# Altium PCB PCB.PcbDoc (part 1 of 2)
Units mm, origin at the board's own origin, x right, y up, seen from the top; angles counter-clockwise.
Board outline 82 x 200 mm, 4 copper layers (Top Layer, Signal Layer 1, Signal Layer 2, Bottom Layer), stack 0.778 mm thick; 206 components, 124 nets, 689 pads, 384 vias.
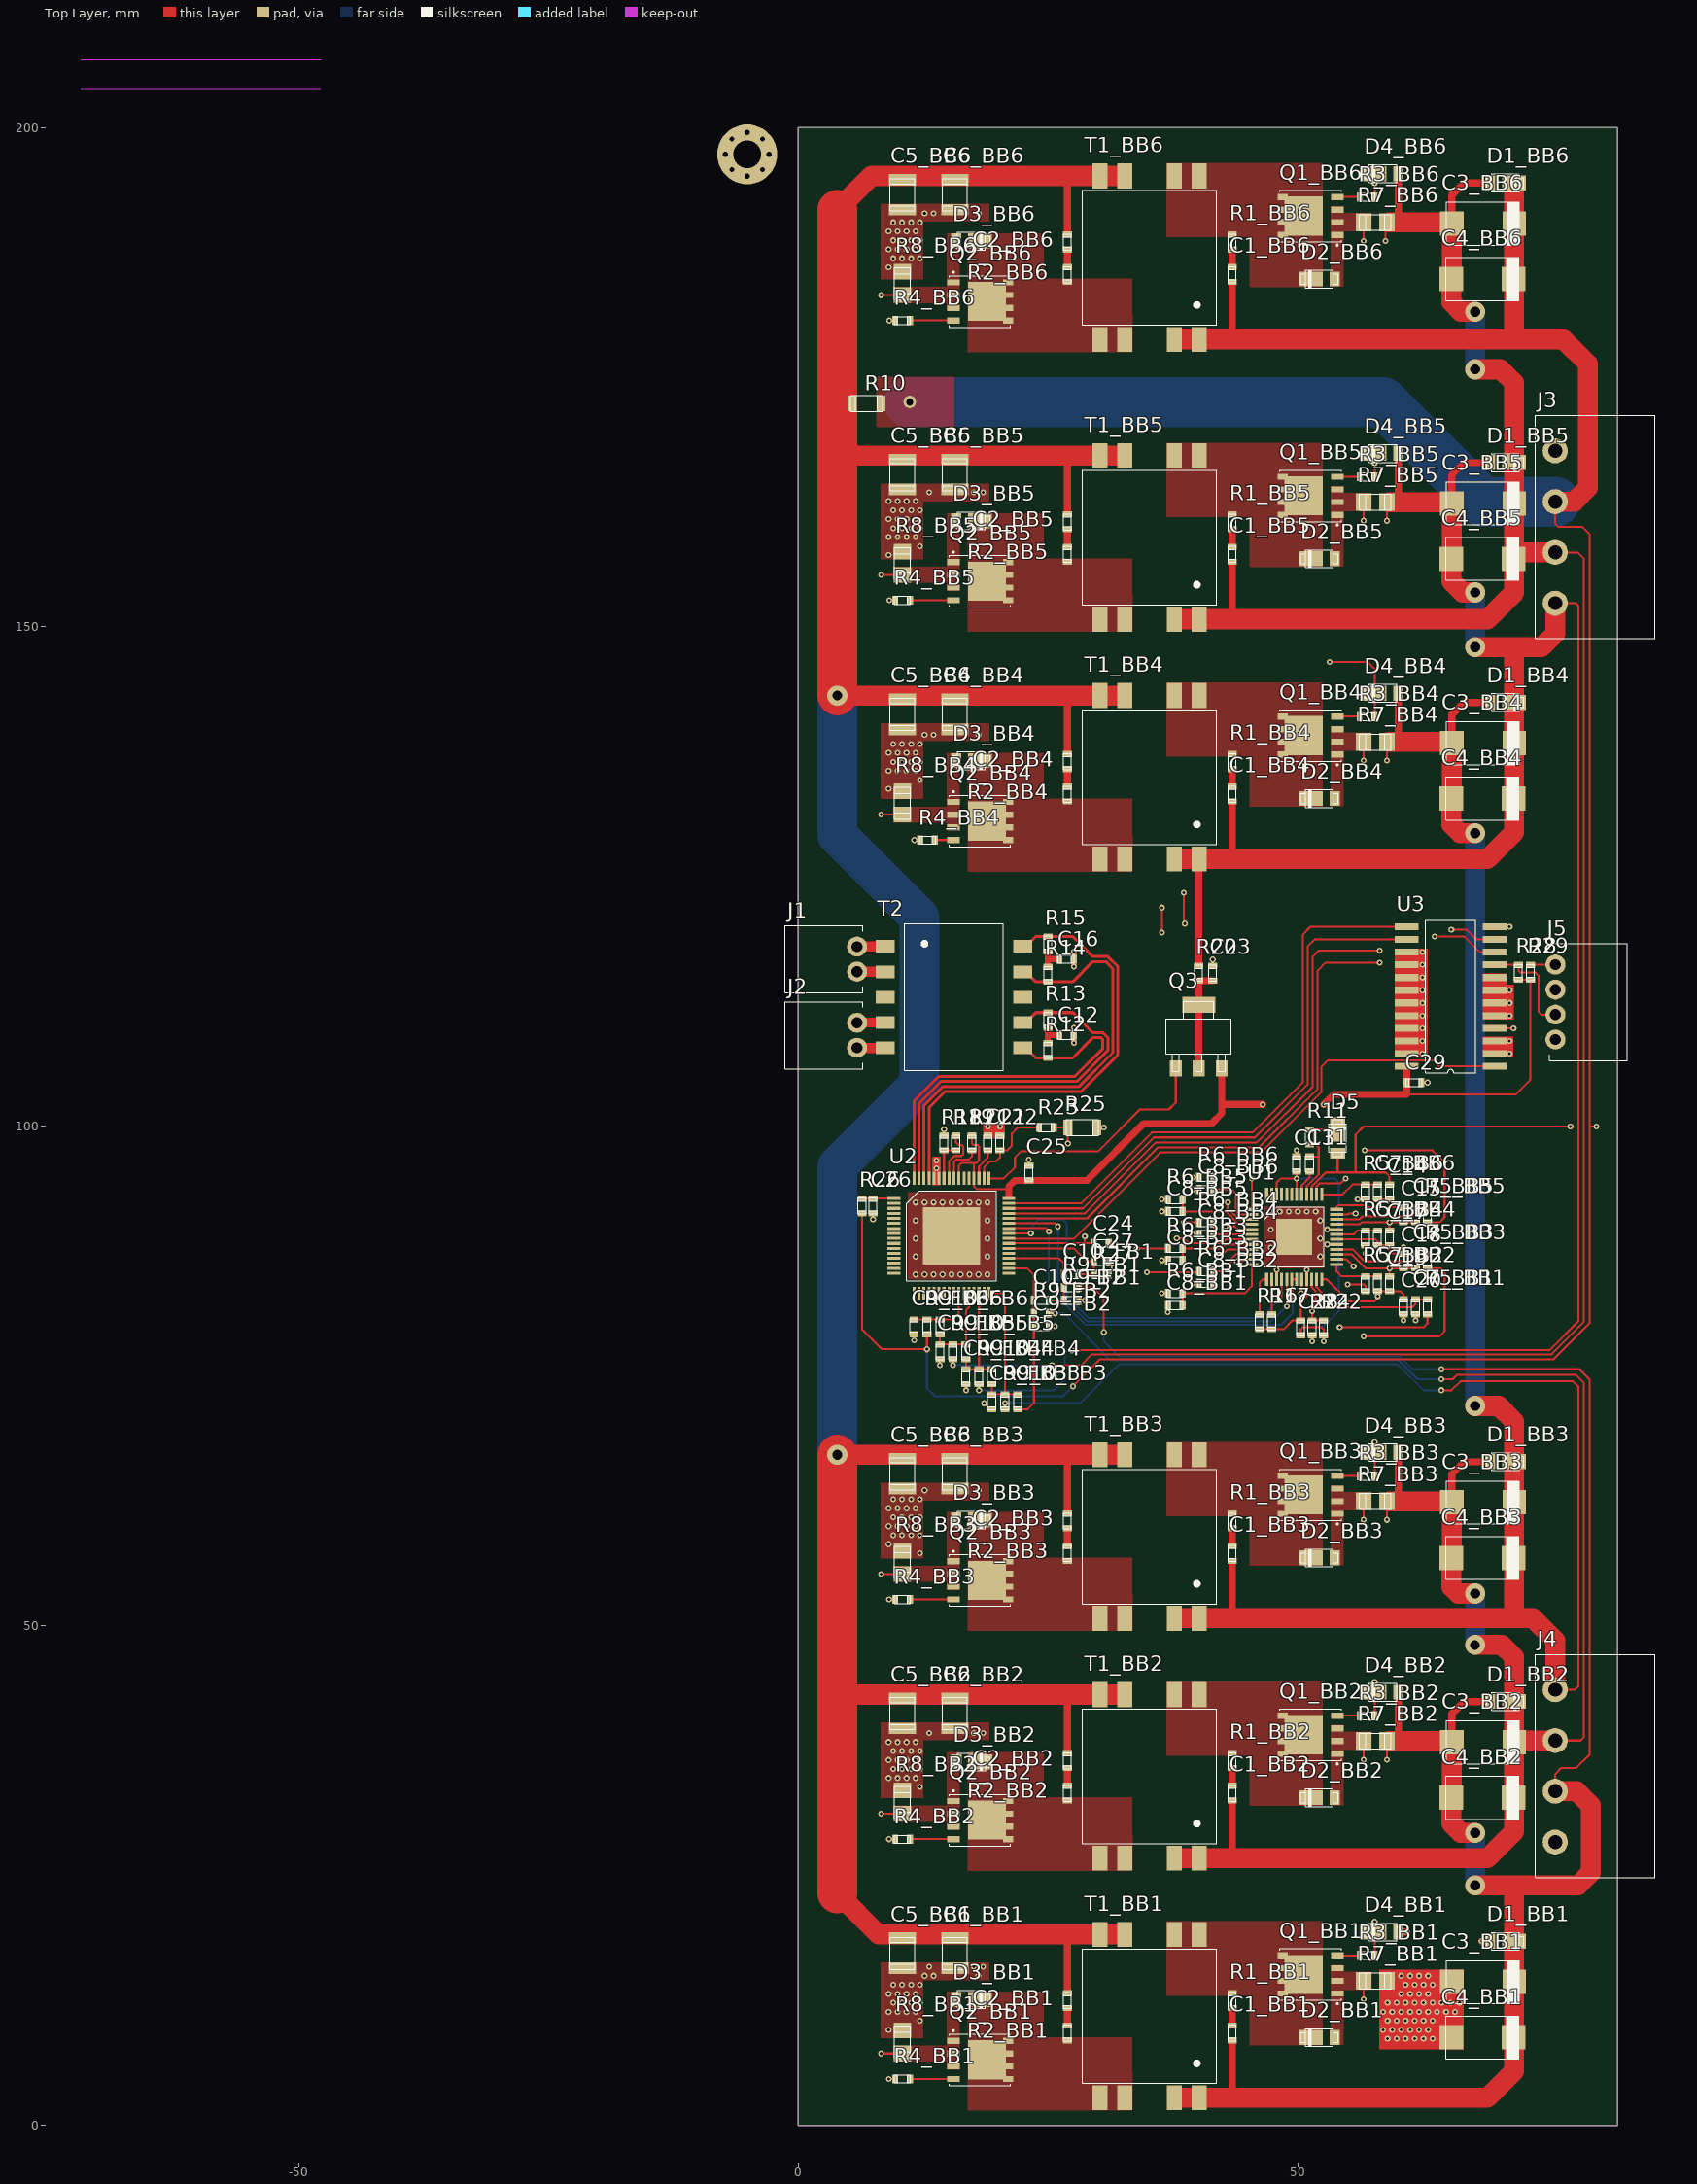
[diagram p0: Top Layer view]
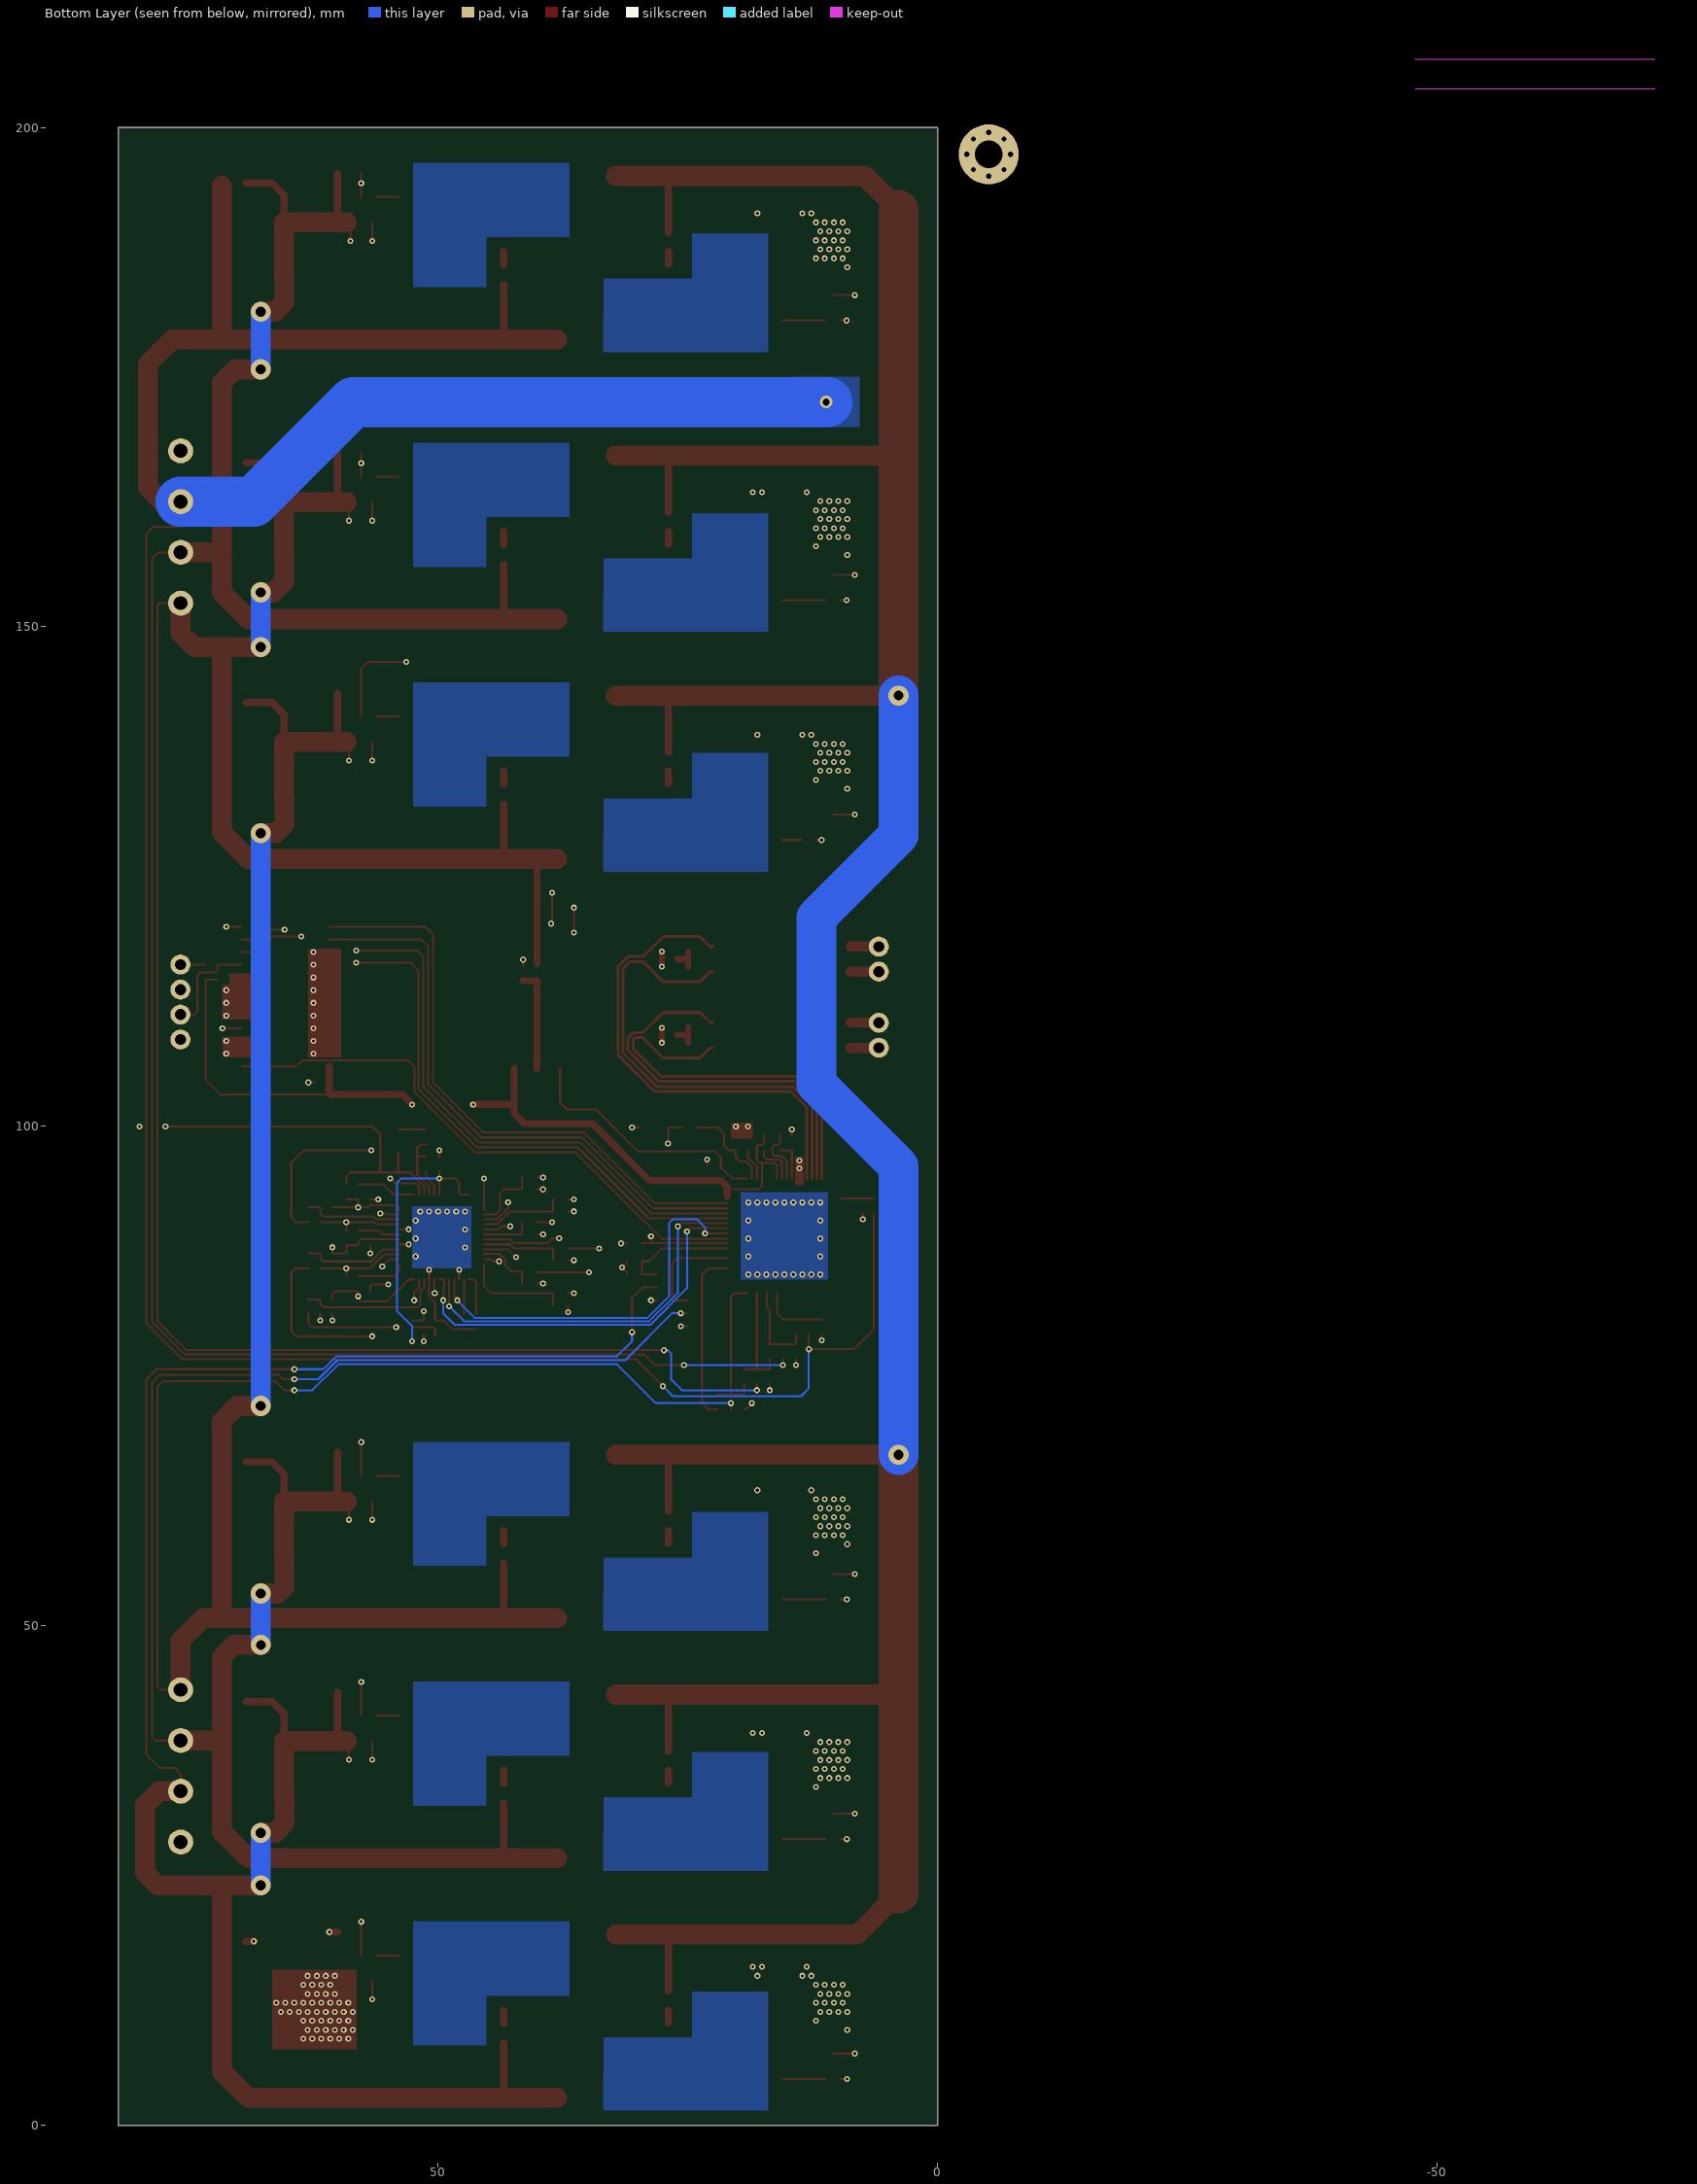
[diagram p1: Bottom Layer view, seen from below]
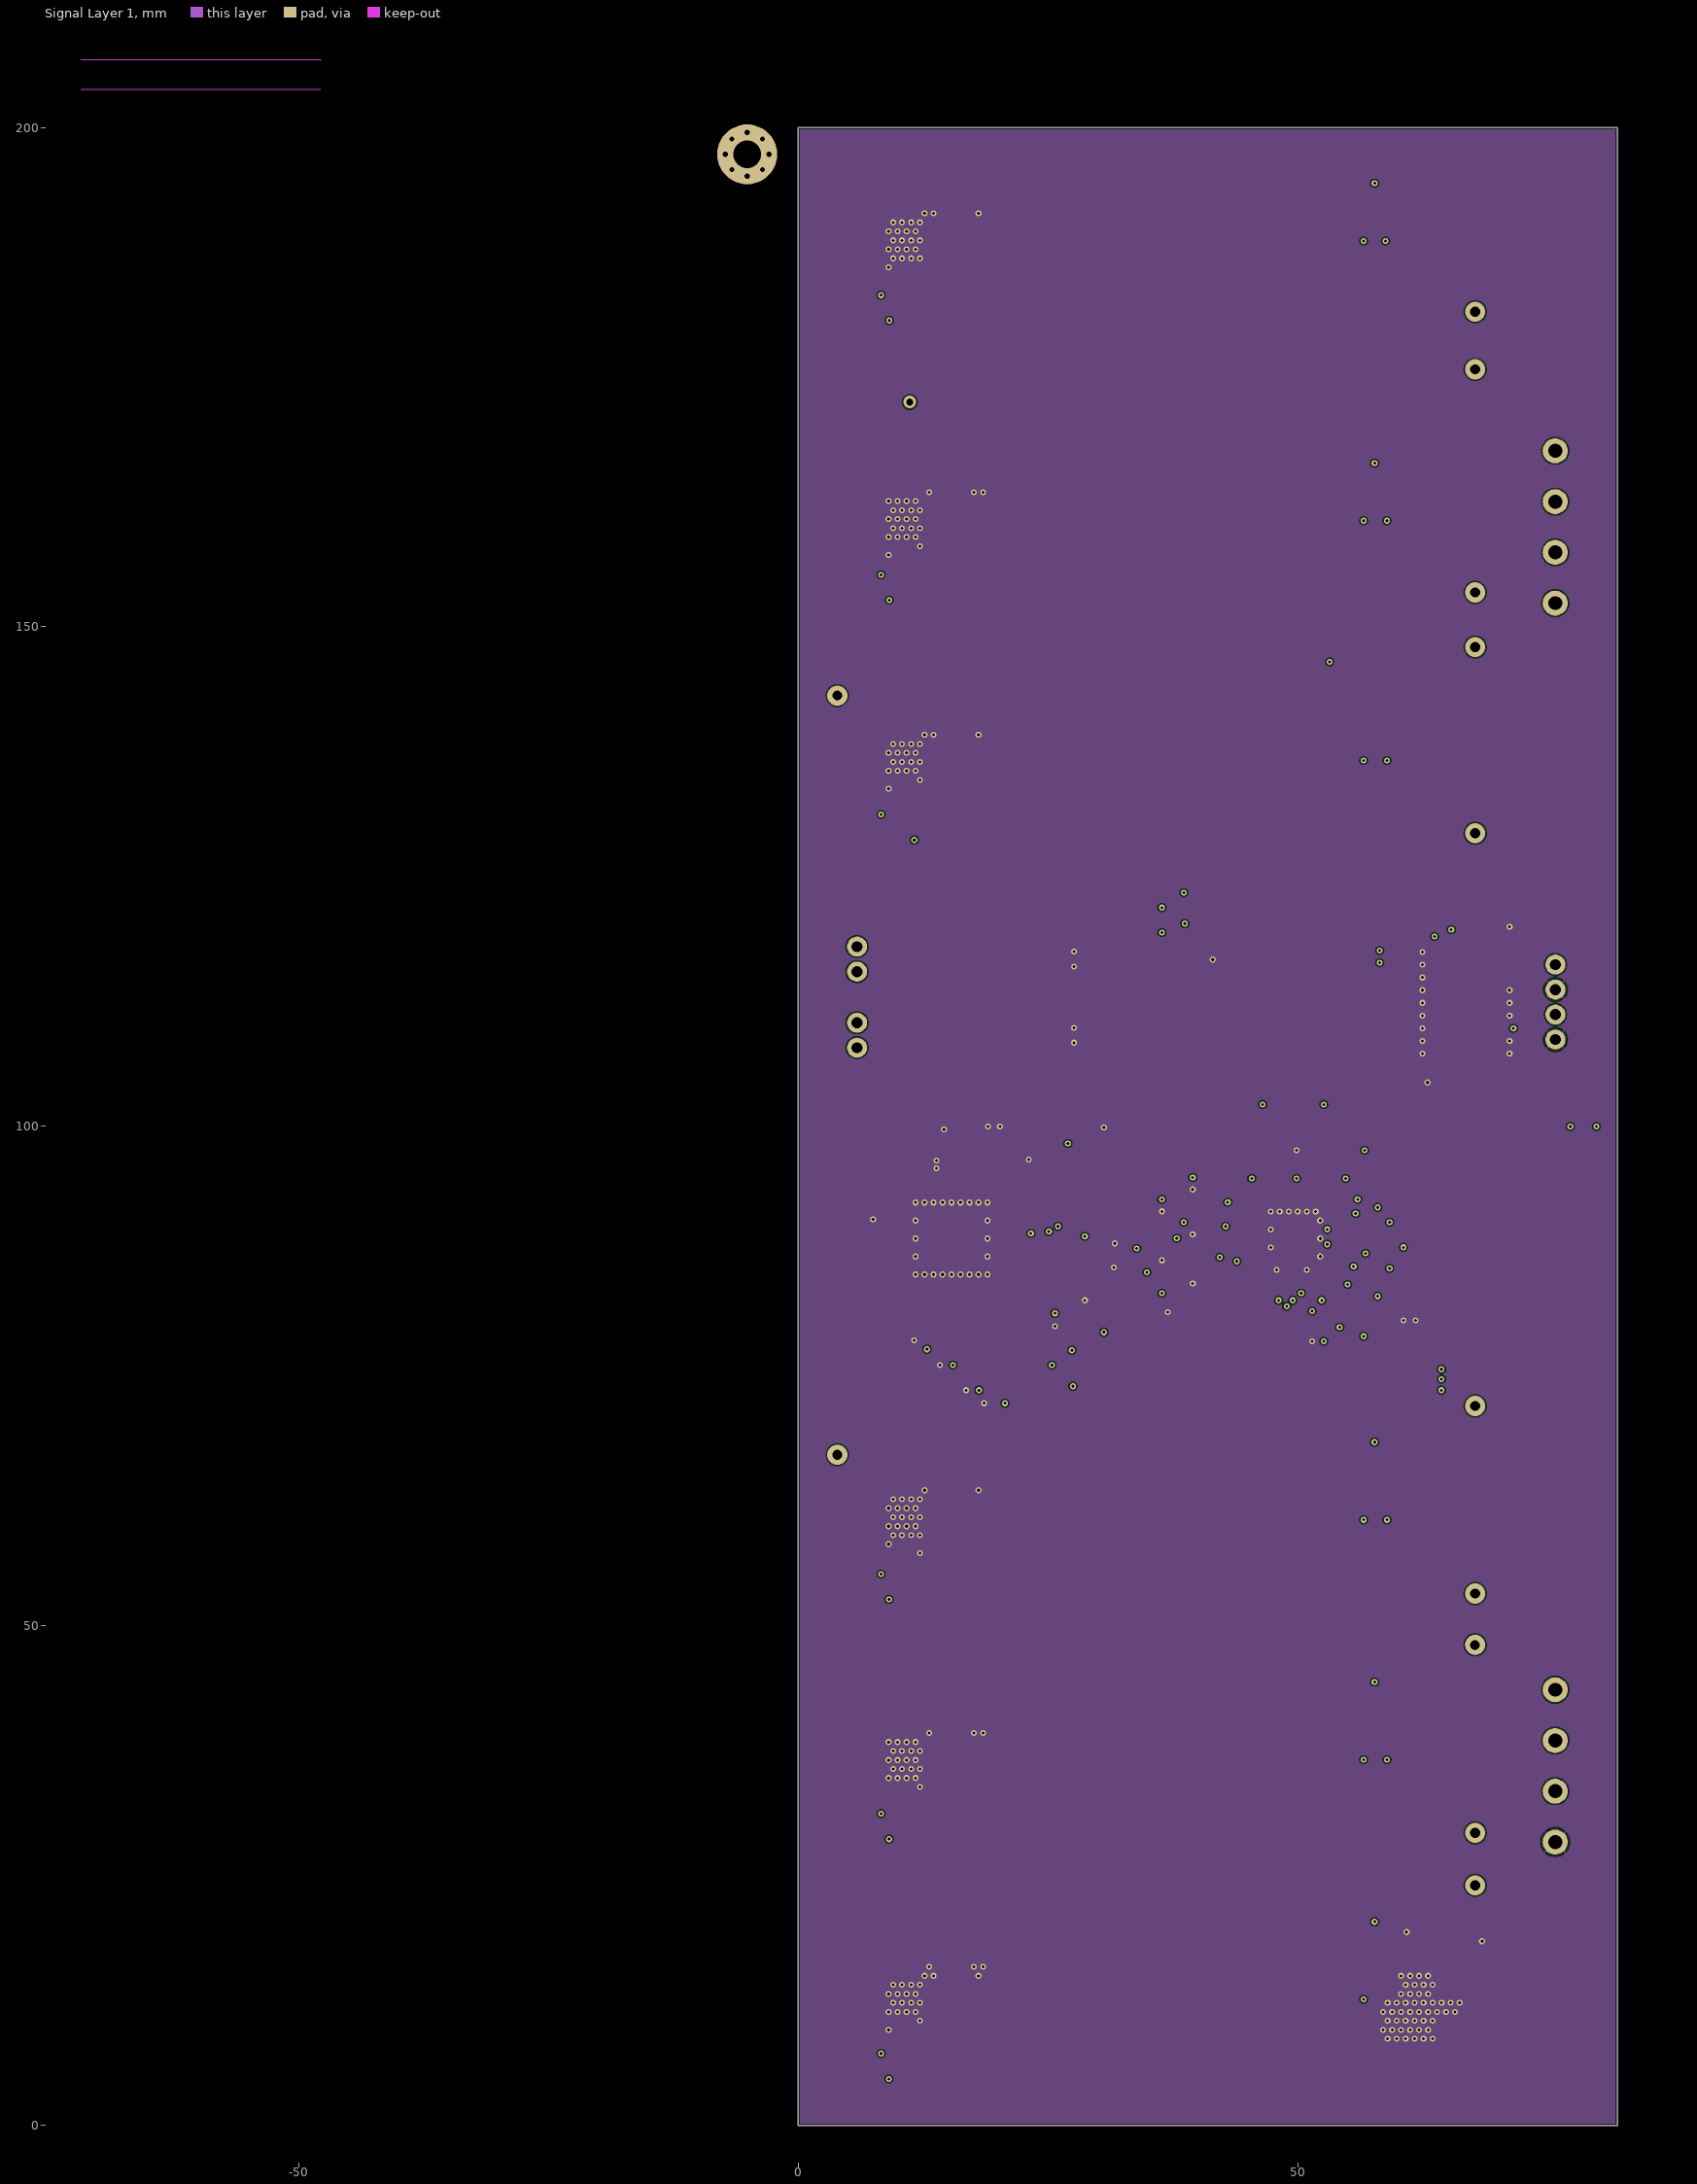
[diagram p2: Signal Layer 1]
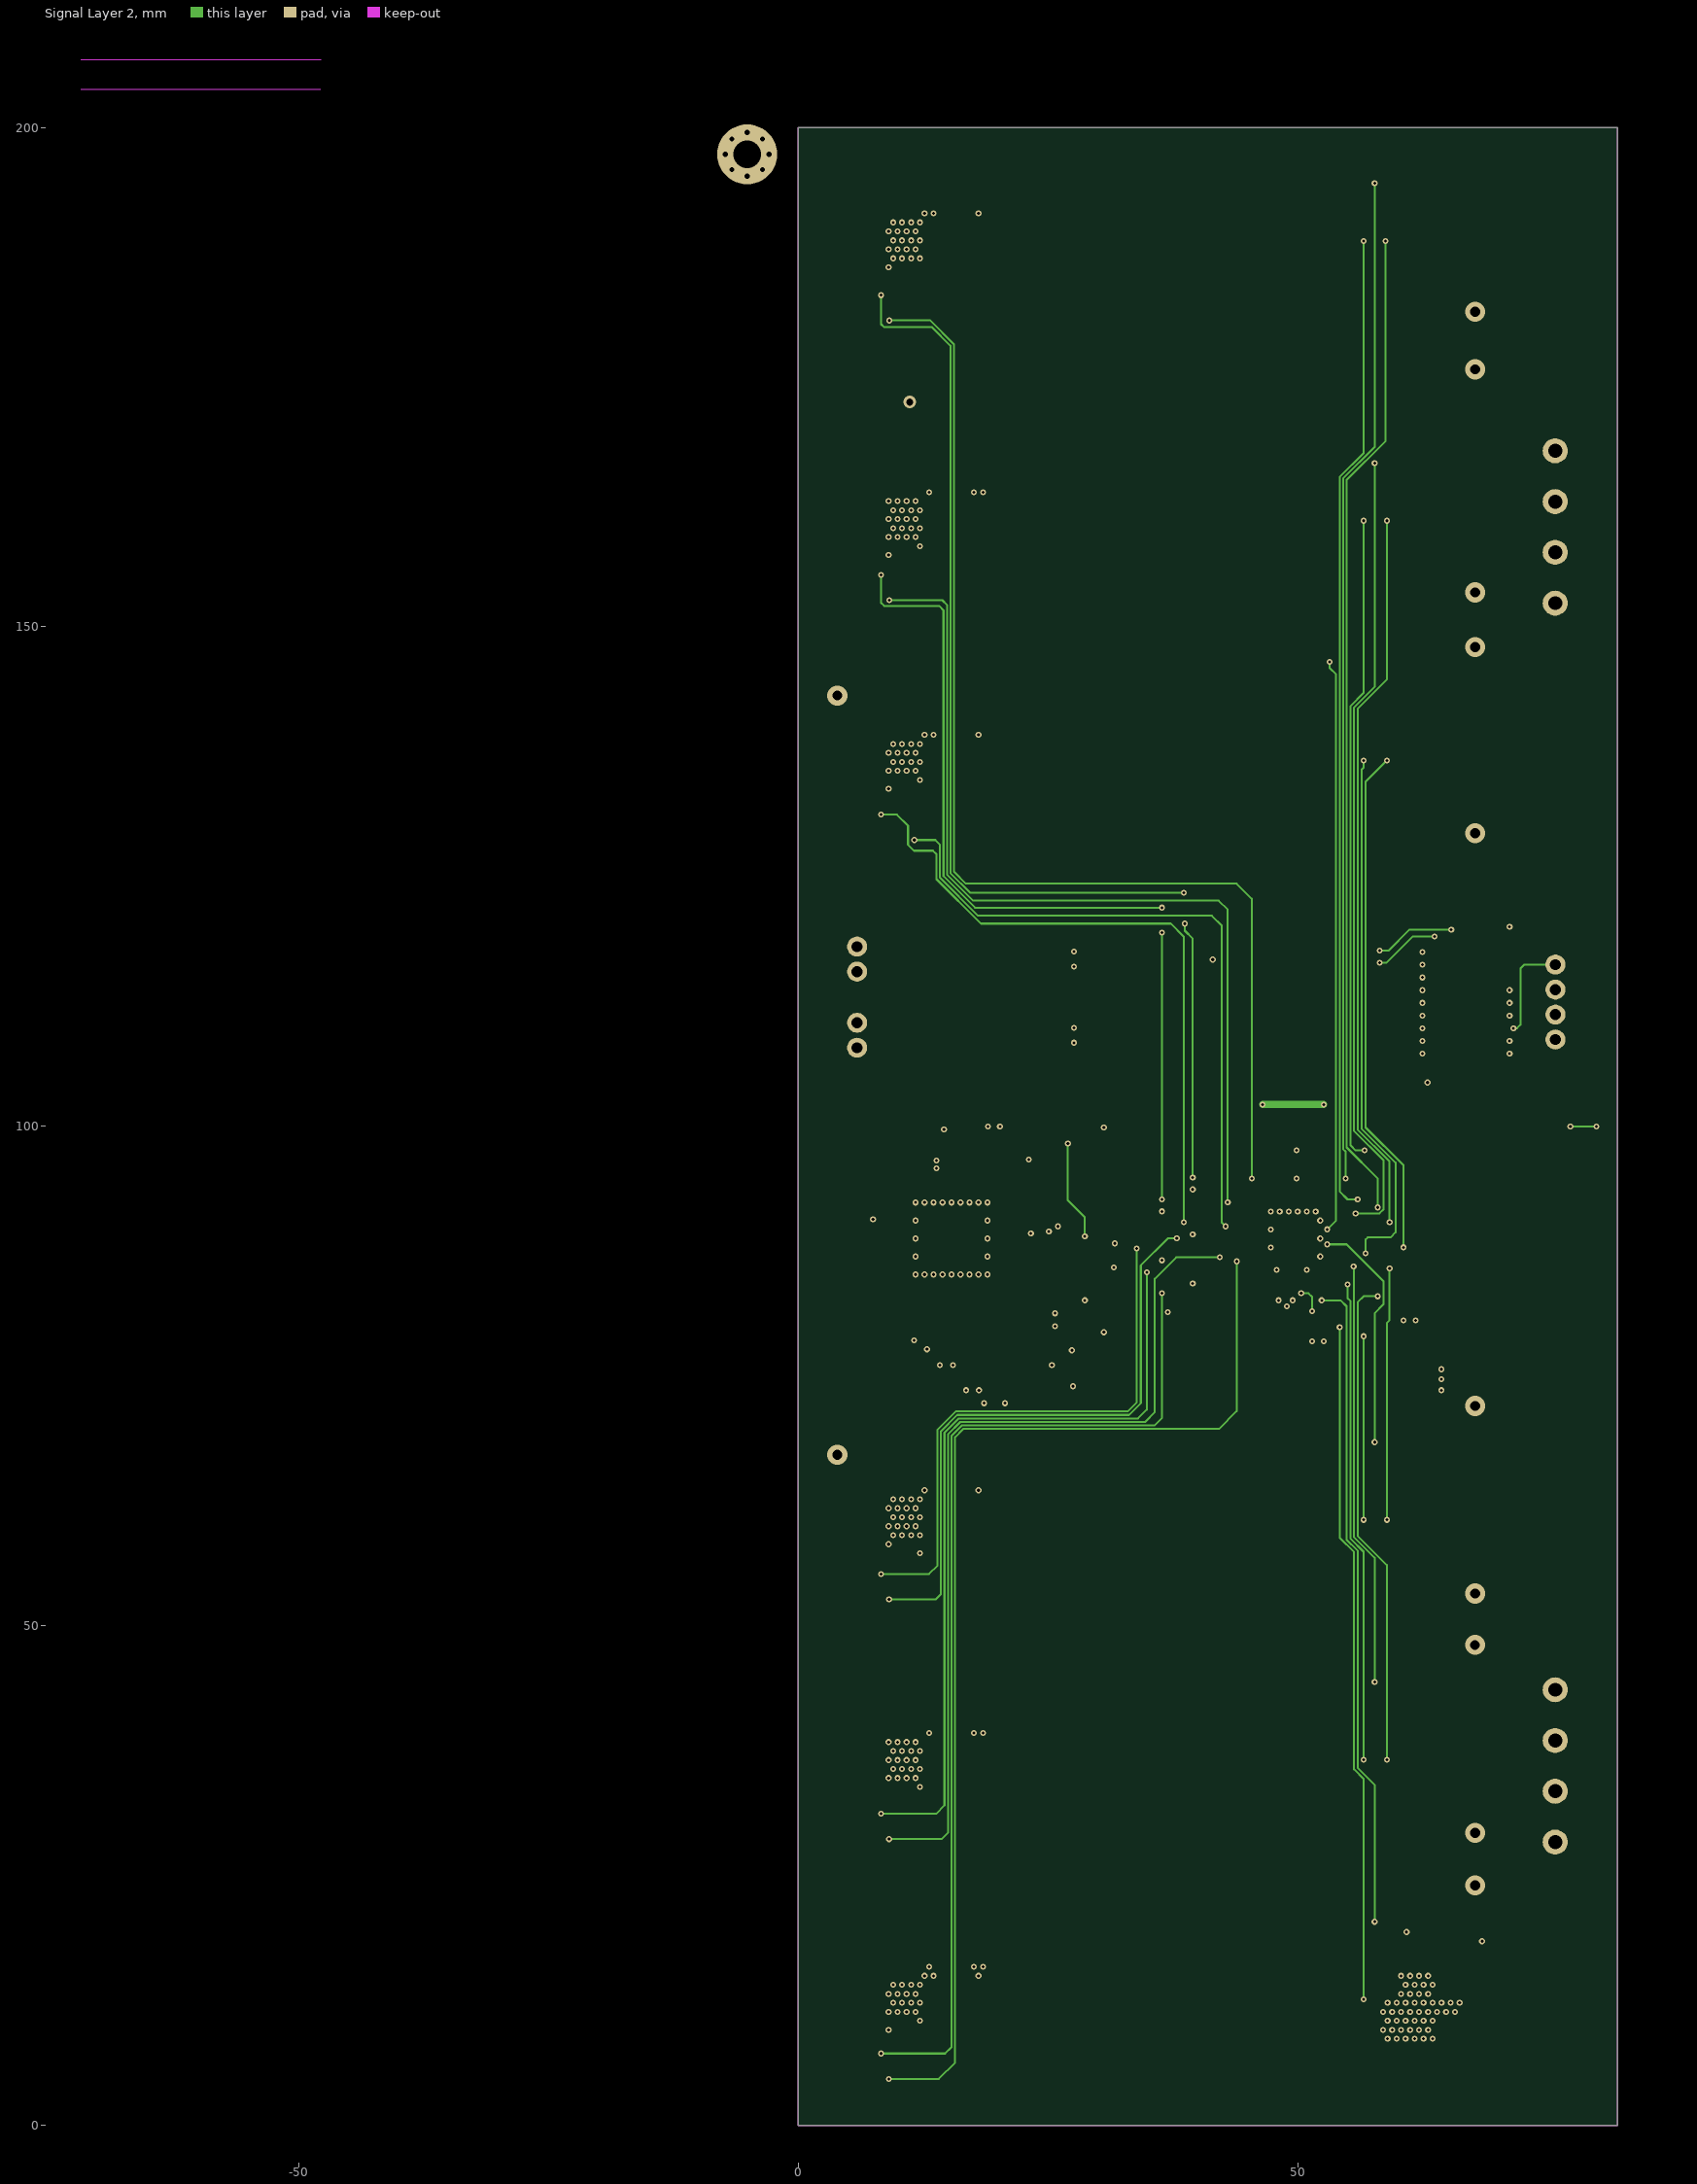
[diagram p3: Signal Layer 2]
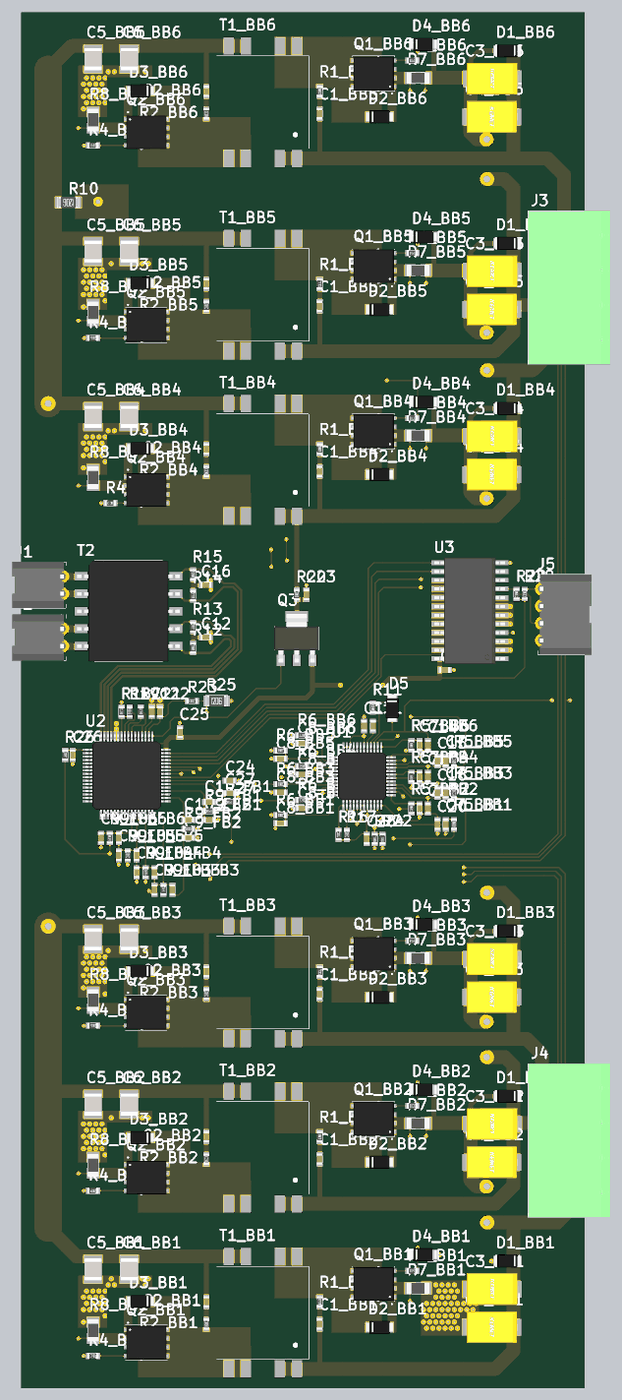
[diagram p5: 3D render of the assembled board from above, using the file's embedded part models]

## Layer stack, top to bottom
Top Solder: solder mask 0.0102, Solder Resist, Dk 3.5
Top Layer: signal copper 0.0356
Dielectric 1: core 0.254, FR-4, Dk 4.2
Signal Layer 1: signal copper 0.036
Dielectric 3: prepreg 0.127, Dk 4.2
Signal Layer 2: signal copper 0.036
Dielectric 2: core 0.254, Dk 4.2
Bottom Layer: signal copper 0.0356
Bottom Solder: solder mask 0.0102, Solder Resist, Dk 3.5

## Board outline
0,0 0,200 82,200 82,0

## Design rules (kind name [scope] priority, off if disabled: settings)
Clearance [All] p1: gap=0.15 ignorepadtopadclearanceinfootprint=FALSE except(0: Arc-Hole Track-Hole SMDPad-Hole THPad-Hole Via-Hole Fill-Hole Poly-Hole Region-Hole Text-Hole)
DiffPairsRouting [All] p1: maxlimit=10 minlimit=0.125 mostfreqgap=0.15 toplayer_minwidth=0.381 toplayer_maxwidth=0.381 toplayer_prefwidth=0.381 midlayer1_minwidth=0.381 midlayer1_maxwidth=0.381 midlayer1_prefwidth=0.381 midlayer2_minwidth=0.381 midlayer2_maxwidth=0.381 midlayer2_prefwidth=0.381 bottomlayer_minwidth=0.381 bottomlayer_maxwidth=0.381 bottomlayer_prefwidth=0.381 maxuncoupledlength=12.7
FabricationTestPointUsage FabricationTestPointUsage_1 [All] p1: valid=0 allowmultiple=FALSE
FabricationTestpoint FabricationTestpoint_1 [All] p1: side=3 testpointundercomponent=TRUE minsize=1.016 maxsize=2.54 preferedsize=1.524 minholesize=0 maxholesize=1.016 preferedholesize=0.813 testpointgrid=0.025 allowsidetop=TRUE allowsidebottom=TRUE usegrid=TRUE gridtolerance=0
HoleSize [All] p1: absolutevalues=TRUE maxlimit=6 minlimit=0.2 maxpercent=80.000 minpercent=20.000
HoleSize FabricationTestpoint [All] p2 off: absolutevalues=TRUE maxlimit=2.54 minlimit=0.025 maxpercent=80.000 minpercent=20.000
HoleSize FabricationTestPointUsage [All] p3 off: absolutevalues=TRUE maxlimit=2.54 minlimit=0.025 maxpercent=80.000 minpercent=20.000
PlaneClearance [All] p1: clearance=0.5
PlaneConnect [All] p1: planeconnectstyle=Relief reliefexpansion=0.4 reliefentries=4 reliefconductorwidth=0.15 reliefairgap=0.15
PolygonConnect [All] p1: thpad.connectstyle=Relief thpad.reliefconductorwidth=0.15 thpad.reliefentries=4 thpad.polygonreliefangle="45 Angle" thpad.airgapwidth=0.254 smdpad.connectstyle=Direct smdpad.reliefconductorwidth=0.15 smdpad.reliefentries=4 smdpad.polygonreliefangle="90 Angle" smdpad.airgapwidth=0.254 via.connectstyle=Direct via.reliefconductorwidth=0.15 via.reliefentries=4 via.polygonreliefangle="45 Angle" via.airgapwidth=0.254
RoomDefinition Overview [InComponentClass('Overview')] p1 off: confinementstyle=ConfineOut formatcopy=TRUE lockcomponents=FALSE outline 87.979,-16.129 114.268,-16.129 114.268,9.271 87.979,9.271
RoomDefinition FB6 [InComponentClass('FB6')] p2 off: confinementstyle=ConfineOut formatcopy=TRUE lockcomponents=FALSE outline 88,-23 114.25,-23 114.25,-17.666 88,-17.666
RoomDefinition FB5 [InComponentClass('FB5')] p3 off: confinementstyle=ConfineOut formatcopy=TRUE lockcomponents=FALSE outline 88,-29.731 114.25,-29.731 114.25,-24.397 88,-24.397
RoomDefinition FB4 [InComponentClass('FB4')] p4 off: confinementstyle=ConfineOut formatcopy=TRUE lockcomponents=FALSE outline 88,-36.462 114.25,-36.462 114.25,-31.128 88,-31.128
RoomDefinition FB3 [InComponentClass('FB3')] p5 off: confinementstyle=ConfineOut formatcopy=TRUE lockcomponents=FALSE outline 88,-43.193 114.25,-43.193 114.25,-37.859 88,-37.859
RoomDefinition FB2 [InComponentClass('FB2')] p6 off: confinementstyle=ConfineOut formatcopy=TRUE lockcomponents=FALSE outline 88,-49.924 114.25,-49.924 114.25,-44.59 88,-44.59
RoomDefinition FB1 [InComponentClass('FB1')] p7 off: confinementstyle=ConfineOut formatcopy=TRUE lockcomponents=FALSE outline 88,-56.655 114.25,-56.655 114.25,-51.321 88,-51.321
RoomDefinition BB6 [InComponentClass('BB6')] p8 off: confinementstyle=ConfineIn formatcopy=TRUE lockcomponents=FALSE outline 2,176 82,176 82,200 2,200
RoomDefinition BB5 [InComponentClass('BB5')] p9 off: confinementstyle=ConfineIn formatcopy=TRUE lockcomponents=FALSE outline 2,148 82,148 82,172 2,172
RoomDefinition BB4 [InComponentClass('BB4')] p10 off: confinementstyle=ConfineIn formatcopy=TRUE lockcomponents=FALSE outline 2,124 82,124 82,148 2,148
RoomDefinition BB3 [InComponentClass('BB3')] p11 off: confinementstyle=ConfineIn formatcopy=TRUE lockcomponents=FALSE outline 2,48 82,48 82,72 2,72
RoomDefinition BB2 [InComponentClass('BB2')] p12 off: confinementstyle=ConfineIn formatcopy=TRUE lockcomponents=FALSE outline 2,24 82,24 82,48 2,48
RoomDefinition BB1 [InComponentClass('BB1')] p13 off: confinementstyle=ConfineIn formatcopy=TRUE lockcomponents=FALSE outline 2,0 82,0 82,24 2,24
RoutingCorners [All] p1: cornerstyle=45-Degree minsetback=1.25 maxsetback=1.25
RoutingVias [All] p1: holewidth=0.3 width=0.6 viastyle="Through Hole" minholewidth=0.2 minwidth=0.45 maxholewidth=1 maxwidth=2
SolderMaskExpansion [All] p1: expansion=0.075
UnRoutedNet [All] p1: checkbadconnections=TRUE
Width [All] p1: maxlimit=10 minlimit=0.125 preferedwidth=0.15
22 further rules are at their usual default settings.

## Classes and differential pairs
net class SEL[3..0]: SEL0 SEL1 SEL2 SEL3
channel class Filter: FB1 FB2 FB3 FB4 FB5 FB6
channel class Balancing: BB1 BB2 BB3 BB4 BB5 BB6
component class Overview: C11 C12 C13 C14 C15 C16 C17 C18 C19 C20 C21 C22 C23 C24 C25 C26 C27 C28 C29 D5 J1 J2 J3 J4 J5 Q3 R10 R11 R12 R13 R14 R15 R16 R17 R18 R19 R20 R21 R22 R23 R24 R25 R26 R27 R28 R29 T2 U1 U2 U3
component class FB6: C9_FB6 C10_FB6 R9_FB6
component class FB5: C9_FB5 C10_FB5 R9_FB5
component class FB4: C9_FB4 C10_FB4 R9_FB4
component class FB3: C9_FB3 C10_FB3 R9_FB3
component class FB2: C9_FB2 C10_FB2 R9_FB2
component class FB1: C9_FB1 C10_FB1 R9_FB1
component class BB6: C1_BB6 C2_BB6 C3_BB6 C4_BB6 C5_BB6 C6_BB6 C7_BB6 C8_BB6 D1_BB6 D2_BB6 D3_BB6 D4_BB6 Q1_BB6 Q2_BB6 R1_BB6 R2_BB6 R3_BB6 R4_BB6 R5_BB6 R6_BB6 R7_BB6 R8_BB6 T1_BB6
component class BB5: C1_BB5 C2_BB5 C3_BB5 C4_BB5 C5_BB5 C6_BB5 C7_BB5 C8_BB5 D1_BB5 D2_BB5 D3_BB5 D4_BB5 Q1_BB5 Q2_BB5 R1_BB5 R2_BB5 R3_BB5 R4_BB5 R5_BB5 R6_BB5 R7_BB5 R8_BB5 T1_BB5
component class BB4: C1_BB4 C2_BB4 C3_BB4 C4_BB4 C5_BB4 C6_BB4 C7_BB4 C8_BB4 D1_BB4 D2_BB4 D3_BB4 D4_BB4 Q1_BB4 Q2_BB4 R1_BB4 R2_BB4 R3_BB4 R4_BB4 R5_BB4 R6_BB4 R7_BB4 R8_BB4 T1_BB4
component class BB3: C1_BB3 C2_BB3 C3_BB3 C4_BB3 C5_BB3 C6_BB3 C7_BB3 C8_BB3 D1_BB3 D2_BB3 D3_BB3 D4_BB3 Q1_BB3 Q2_BB3 R1_BB3 R2_BB3 R3_BB3 R4_BB3 R5_BB3 R6_BB3 R7_BB3 R8_BB3 T1_BB3
component class BB2: C1_BB2 C2_BB2 C3_BB2 C4_BB2 C5_BB2 C6_BB2 C7_BB2 C8_BB2 D1_BB2 D2_BB2 D3_BB2 D4_BB2 Q1_BB2 Q2_BB2 R1_BB2 R2_BB2 R3_BB2 R4_BB2 R5_BB2 R6_BB2 R7_BB2 R8_BB2 T1_BB2
component class BB1: C1_BB1 C2_BB1 C3_BB1 C4_BB1 C5_BB1 C6_BB1 C7_BB1 C8_BB1 D1_BB1 D2_BB1 D3_BB1 D4_BB1 Q1_BB1 Q2_BB1 R1_BB1 R2_BB1 R3_BB1 R4_BB1 R5_BB1 R6_BB1 R7_BB1 R8_BB1 T1_BB1

## Components (designator, comment, footprint, x,y, rotation, side; value= is the part's Value field where it differs from the comment)
C1_BB1 "100pF" "CAP 0603" 43.45,10.025 r270 top (schematic designator C1)
C1_BB2 "100pF" "CAP 0603" 43.45,34.025 r270 top (schematic designator C1)
C1_BB3 "100pF" "CAP 0603" 43.45,58.025 r270 top (schematic designator C1)
C1_BB4 "100pF" "CAP 0603" 43.45,134.025 r270 top (schematic designator C1)
C1_BB5 "100pF" "CAP 0603" 43.45,158.025 r270 top (schematic designator C1)
C1_BB6 "100pF" "CAP 0603" 43.45,186.025 r270 top (schematic designator C1)
C2_BB1 "100pF" "CAP 0603" 26.95,11.775 r90 top (schematic designator C2)
C2_BB2 "100pF" "CAP 0603" 26.95,35.775 r90 top (schematic designator C2)
C2_BB3 "100pF" "CAP 0603" 26.95,59.775 r90 top (schematic designator C2)
C2_BB4 "100pF" "CAP 0603" 26.95,135.775 r90 top (schematic designator C2)
C2_BB5 "100pF" "CAP 0603" 26.95,159.775 r90 top (schematic designator C2)
C2_BB6 "100pF" "CAP 0603" 26.95,187.775 r90 top (schematic designator C2)
C3_BB1 "100uF" "KO-CAP T591D" 71.675,14.375 r180 top (schematic designator C3)
C3_BB2 "100uF" "KO-CAP T591D" 71.675,38.375 r180 top (schematic designator C3)
C3_BB3 "100uF" "KO-CAP T591D" 71.675,62.375 r180 top (schematic designator C3)
C3_BB4 "100uF" "KO-CAP T591D" 71.675,138.375 r180 top (schematic designator C3)
C3_BB5 "100uF" "KO-CAP T591D" 71.675,162.375 r180 top (schematic designator C3)
C3_BB6 "100uF" "KO-CAP T591D" 71.675,190.375 r180 top (schematic designator C3)
C4_BB1 "100uF" "KO-CAP T591D" 71.615,8.825 r180 top (schematic designator C4)
C4_BB2 "100uF" "KO-CAP T591D" 71.615,32.825 r180 top (schematic designator C4)
C4_BB3 "100uF" "KO-CAP T591D" 71.615,56.825 r180 top (schematic designator C4)
C4_BB4 "100uF" "KO-CAP T591D" 71.615,132.825 r180 top (schematic designator C4)
C4_BB5 "100uF" "KO-CAP T591D" 71.615,156.825 r180 top (schematic designator C4)
C4_BB6 "100uF" "KO-CAP T591D" 71.615,184.825 r180 top (schematic designator C4)
C5_BB1 "2.2uF" "CAP 1210" 10.45,15.75 r90 top (schematic designator C5)
C5_BB2 "2.2uF" "CAP 1210" 10.45,39.75 r90 top (schematic designator C5)
C5_BB3 "2.2uF" "CAP 1210" 10.45,63.75 r90 top (schematic designator C5)
C5_BB4 "2.2uF" "CAP 1210" 10.45,139.75 r90 top (schematic designator C5)
C5_BB5 "2.2uF" "CAP 1210" 10.45,163.75 r90 top (schematic designator C5)
C5_BB6 "2.2uF" "CAP 1210" 10.45,191.75 r90 top (schematic designator C5)
C6_BB1 "2.2uF" "CAP 1210" 15.7,15.75 r90 top (schematic designator C6)
C6_BB2 "2.2uF" "CAP 1210" 15.7,39.75 r90 top (schematic designator C6)
C6_BB3 "2.2uF" "CAP 1210" 15.7,63.75 r90 top (schematic designator C6)
C6_BB4 "2.2uF" "CAP 1210" 15.7,139.75 r90 top (schematic designator C6)
C6_BB5 "2.2uF" "CAP 1210" 15.7,163.75 r90 top (schematic designator C6)
C6_BB6 "2.2uF" "CAP 1210" 15.7,191.75 r90 top (schematic designator C6)
C7_BB1 "1nF" "CAP 0603" 61.8,81.2 r90 top (schematic designator C7)
C7_BB2 "1nF" "CAP 0603" 58,83.5 r90 top (schematic designator C7)
C7_BB3 "1nF" "CAP 0603" 61.8,85.8 r90 top (schematic designator C7)
C7_BB4 "1nF" "CAP 0603" 58,88.1 r90 top (schematic designator C7)
C7_BB5 "1nF" "CAP 0603" 61.8,90.4 r90 top (schematic designator C7)
C7_BB6 "1nF" "CAP 0603" 58,92.7 r90 top (schematic designator C7)
C8_BB1 "1nF" "CAP 0603" 37,82.1 r0 top (schematic designator C8)
C8_BB2 "1nF" "CAP 0603" 40.1,84.3 r0 top (schematic designator C8)
C8_BB3 "1nF" "CAP 0603" 37,86.6 r0 top (schematic designator C8)
C8_BB4 "1nF" "CAP 0603" 40.1,89.2 r0 top (schematic designator C8)
C8_BB5 "1nF" "CAP 0603" 37,91.5 r0 top (schematic designator C8)
C8_BB6 "1nF" "CAP 0603" 40.1,93.7 r0 top (schematic designator C8)
C9_FB1 "100nF" "CAP 0603" 28.1,82.6 r180 top (schematic designator C9)
C9_FB2 "100nF" "CAP 0603" 25.1,80 r180 top (schematic designator C9)
C9_FB3 "100nF" "CAP 0603" 19.4,71.7 r90 top (schematic designator C9)
C9_FB4 "100nF" "CAP 0603" 16.8,74.2 r90 top (schematic designator C9)
C9_FB5 "100nF" "CAP 0603" 14.2,76.7 r90 top (schematic designator C9)
C9_FB6 "100nF" "CAP 0603" 11.6,79.2 r90 top (schematic designator C9)
C10_FB1 "100nF" "CAP 0603" 28.1,85.2 r180 top (schematic designator C10)
C10_FB2 "100nF" "CAP 0603" 25.1,82.6 r180 top (schematic designator C10)
C10_FB3 "100nF" "CAP 0603" 22,71.7 r90 top (schematic designator C10)
C10_FB4 "100nF" "CAP 0603" 19.4,74.2 r90 top (schematic designator C10)
C10_FB5 "100nF" "CAP 0603" 16.8,76.7 r90 top (schematic designator C10)
C10_FB6 "100nF" "CAP 0603" 14.2,79.2 r90 top (schematic designator C10)
C11 "100nF" "CAP 0603" 51.2,95.5 r90 top
C12 "10nF" "CAP 0603" 27.6,109.13 r180 top
C13 "1uF" "CAP 0603" 49.9,95.5 r90 top
C14 "1uF" "CAP 0603" 59.2,92.7 r90 top
C15 "1uF" "CAP 0603" 60.6,90.4 r90 top
C16 "10nF" "CAP 0603" 27.6,116.75 r180 top
C17 "1uF" "CAP 0603" 59.2,88.1 r90 top
C18 "1uF" "CAP 0603" 60.6,85.8 r90 top
C19 "1uF" "CAP 0603" 59.2,83.5 r90 top
C20 "1uF" "CAP 0603" 60.6,81.2 r90 top
C21 "1uF" "CAP 0603" 19,97.6 r90 top
C22 "1uF" "CAP 0603" 20.2,99.1 r270 top
C23 "100nF" "CAP 0603" 41.5,116.1 r270 top
C24 "1uF" "CAP 0603" 31.1,88.3 r180 top
C25 "1uF" "CAP 0603" 23.1,96.1 r270 top
C26 "100nF" "CAP 0603" 7.5,91.3 r90 top
C27 "100nF" "CAP 0603" 31.1,86.5 r180 top
C28 "1uF" "CAP 0603" 50.3,80.6 r270 top
C29 "100nF" "CAP 0603" 62.4,104.4 r180 top
D1_BB1 "DFLS1100-7" PowerDI-123 69.275,18.45 r0 top (schematic designator D1)
D1_BB2 "DFLS1100-7" PowerDI-123 69.275,42.45 r0 top (schematic designator D1)
D1_BB3 "DFLS1100-7" PowerDI-123 69.275,66.45 r0 top (schematic designator D1)
D1_BB4 "DFLS1100-7" PowerDI-123 69.275,142.45 r0 top (schematic designator D1)
D1_BB5 "DFLS1100-7" PowerDI-123 69.275,166.45 r0 top (schematic designator D1)
D1_BB6 "DFLS1100-7" PowerDI-123 69.275,194.45 r0 top (schematic designator D1)
D2_BB1 "DFLS1100-7" PowerDI-123 53.7,8.825 r180 top (schematic designator D2)
D2_BB2 "DFLS1100-7" PowerDI-123 53.7,32.825 r180 top (schematic designator D2)
D2_BB3 "DFLS1100-7" PowerDI-123 53.7,56.825 r180 top (schematic designator D2)
D2_BB4 "DFLS1100-7" PowerDI-123 53.7,132.825 r180 top (schematic designator D2)
D2_BB5 "DFLS1100-7" PowerDI-123 53.7,156.825 r180 top (schematic designator D2)
D2_BB6 "DFLS1100-7" PowerDI-123 53.7,184.825 r180 top (schematic designator D2)
D3_BB1 "DFLS1100-7" PowerDI-123 15.825,12.625 r0 top (schematic designator D3)
D3_BB2 "DFLS1100-7" PowerDI-123 15.85,36.4 r0 top (schematic designator D3)
D3_BB3 "DFLS1100-7" PowerDI-123 15.825,60.625 r0 top (schematic designator D3)
D3_BB4 "DFLS1100-7" PowerDI-123 15.825,136.625 r0 top (schematic designator D3)
D3_BB5 "DFLS1100-7" PowerDI-123 15.825,160.625 r0 top (schematic designator D3)
D3_BB6 "DFLS1100-7" PowerDI-123 15.825,188.625 r0 top (schematic designator D3)
D4_BB1 "DFLS1100-7" PowerDI-123 60.075,19.375 r180 top (schematic designator D4)
D4_BB2 "DFLS1100-7" PowerDI-123 60.075,43.375 r180 top (schematic designator D4)
D4_BB3 "DFLS1100-7" PowerDI-123 60.075,67.375 r180 top (schematic designator D4)
D4_BB4 "DFLS1100-7" PowerDI-123 60.075,143.375 r180 top (schematic designator D4)
D4_BB5 "DFLS1100-7" PowerDI-123 60.075,167.375 r180 top (schematic designator D4)
D4_BB6 "DFLS1100-7" PowerDI-123 60.075,195.375 r180 top (schematic designator D4)
D5 "DFLS1100-7" PowerDI-123 54,97.325 r90 top
J1 "1778625" "PTSM 0.5 2 HH THT" 5.9,118 r270 top
J2 "1778625" "PTSM 0.5 2 HH THT" 5.9,110.38 r270 top
J3 "1757268" "MSTBA 2.5 4 G THT 5.08" 75.775,152.38 r90 top
J4 "1757268" "MSTBA 2.5 4 G THT 5.08" 75.775,28.38 r90 top
J5 "1778780" "PTSM 0.5 4 HH THT" 75.8,108.7 r90 top
Q1_BB1 "SiR882DP" "PowerPAK SO-8 Single" 53.96,13.22 r180 top (schematic designator Q1)
Q1_BB2 "SiR882DP" "PowerPAK SO-8 Single" 53.96,37.22 r180 top (schematic designator Q1)
Q1_BB3 "SiR882DP" "PowerPAK SO-8 Single" 53.96,61.22 r180 top (schematic designator Q1)
Q1_BB4 "SiR882DP" "PowerPAK SO-8 Single" 53.96,137.22 r180 top (schematic designator Q1)
Q1_BB5 "SiR882DP" "PowerPAK SO-8 Single" 53.96,161.22 r180 top (schematic designator Q1)
Q1_BB6 "SiR882DP" "PowerPAK SO-8 Single" 53.96,189.22 r180 top (schematic designator Q1)
Q2_BB1 "SiR882DP" "PowerPAK SO-8 Single" 15.54,8.48 r0 top (schematic designator Q2)
Q2_BB2 "SiR882DP" "PowerPAK SO-8 Single" 15.54,32.48 r0 top (schematic designator Q2)
Q2_BB3 "SiR882DP" "PowerPAK SO-8 Single" 15.54,56.48 r0 top (schematic designator Q2)
Q2_BB4 "SiR882DP" "PowerPAK SO-8 Single" 15.54,132.48 r0 top (schematic designator Q2)
Q2_BB5 "SiR882DP" "PowerPAK SO-8 Single" 15.54,156.48 r0 top (schematic designator Q2)
Q2_BB6 "SiR882DP" "PowerPAK SO-8 Single" 15.54,184.48 r0 top (schematic designator Q2)
Q3 "DZT5551" SOT-223 37.8,105.8 r0 top
R1_BB1 "330R" 0603 43.45,13.275 r270 top (schematic designator R1)
R1_BB2 "330R" 0603 43.45,37.275 r270 top (schematic designator R1)
R1_BB3 "330R" 0603 43.45,61.275 r270 top (schematic designator R1)
R1_BB4 "330R" 0603 43.45,137.275 r270 top (schematic designator R1)
R1_BB5 "330R" 0603 43.45,161.275 r270 top (schematic designator R1)
R1_BB6 "330R" 0603 43.45,189.275 r270 top (schematic designator R1)
R2_BB1 "330R" 0603 26.95,8.525 r90 top (schematic designator R2)
R2_BB2 "330R" 0603 26.95,32.525 r90 top (schematic designator R2)
R2_BB3 "330R" 0603 26.95,56.525 r90 top (schematic designator R2)
R2_BB4 "330R" 0603 26.95,132.525 r90 top (schematic designator R2)
R2_BB5 "330R" 0603 26.95,156.525 r90 top (schematic designator R2)
R2_BB6 "330R" 0603 26.95,184.525 r90 top (schematic designator R2)
R3_BB1 "5.1R" 0603 57.7,17.03 r180 top (schematic designator R3)
R3_BB2 "5.1R" 0603 57.7,41.03 r180 top (schematic designator R3)
R3_BB3 "5.1R" 0603 57.7,65.03 r180 top (schematic designator R3)
R3_BB4 "5.1R" 0603 57.7,141.03 r180 top (schematic designator R3)
R3_BB5 "5.1R" 0603 57.7,165.03 r180 top (schematic designator R3)
R3_BB6 "5.1R" 0603 57.7,193.03 r180 top (schematic designator R3)
R4_BB1 "5.1R" 0603 11.2,4.67 r180 top (schematic designator R4)
R4_BB2 "5.1R" 0603 11.2,28.67 r180 top (schematic designator R4)
R4_BB3 "5.1R" 0603 11.2,52.67 r180 top (schematic designator R4)
R4_BB4 "5.1R" 0603 13.7,128.67 r180 top (schematic designator R4)
R4_BB5 "5.1R" 0603 11.2,152.67 r180 top (schematic designator R4)
R4_BB6 "5.1R" 0603 11.2,180.67 r180 top (schematic designator R4)
R5_BB1 "1.1k" 0603 63,82.7 r270 top (schematic designator R5)
R5_BB2 "1.1k" 0603 56.8,85 r270 top (schematic designator R5)
R5_BB3 "1.1k" 0603 63,87.3 r270 top (schematic designator R5)
R5_BB4 "1.1k" 0603 56.8,89.6 r270 top (schematic designator R5)
R5_BB5 "1.1k" 0603 63,91.9 r270 top (schematic designator R5)
R5_BB6 "1.1k" 0603 56.8,94.2 r270 top (schematic designator R5)
R6_BB1 "360R" 0603 37,83.3 r0 top (schematic designator R6)
R6_BB2 "360R" 0603 40.1,85.5 r0 top (schematic designator R6)
R6_BB3 "360R" 0603 37,87.8 r0 top (schematic designator R6)
R6_BB4 "360R" 0603 40.1,90.4 r0 top (schematic designator R6)
R6_BB5 "360R" 0603 37,92.7 r0 top (schematic designator R6)
R6_BB6 "360R" 0603 40.1,94.9 r0 top (schematic designator R6)
R7_BB1 "5m" "WSL1206 2m to 5m9" 58.93,14.49 r180 top (schematic designator R7)
R7_BB2 "5m" "WSL1206 2m to 5m9" 58.93,38.49 r180 top (schematic designator R7)
R7_BB3 "5m" "WSL1206 2m to 5m9" 58.93,62.49 r180 top (schematic designator R7)
R7_BB4 "5m" "WSL1206 2m to 5m9" 58.93,138.49 r180 top (schematic designator R7)
R7_BB5 "5m" "WSL1206 2m to 5m9" 58.93,162.49 r180 top (schematic designator R7)
R7_BB6 "5m" "WSL1206 2m to 5m9" 58.93,190.49 r180 top (schematic designator R7)
R8_BB1 "5m" "WSL1206 2m to 5m9" 10.45,9.54 r270 top (schematic designator R8)
R8_BB2 "5m" "WSL1206 2m to 5m9" 10.45,33.54 r270 top (schematic designator R8)
R8_BB3 "5m" "WSL1206 2m to 5m9" 10.45,57.54 r270 top (schematic designator R8)
R8_BB4 "5m" "WSL1206 2m to 5m9" 10.45,133.54 r270 top (schematic designator R8)
R8_BB5 "5m" "WSL1206 2m to 5m9" 10.45,157.54 r270 top (schematic designator R8)
R8_BB6 "5m" "WSL1206 2m to 5m9" 10.45,185.54 r270 top (schematic designator R8)
R9_FB1 "10R" 0603 28.1,83.9 r180 top (schematic designator R9)
R9_FB2 "10R" 0603 25.1,81.3 r180 top (schematic designator R9)
R9_FB3 "10R" 0603 20.7,71.7 r90 top (schematic designator R9)
R9_FB4 "10R" 0603 18.1,74.2 r90 top (schematic designator R9)
R9_FB5 "10R" 0603 15.5,76.7 r90 top (schematic designator R9)
R9_FB6 "10R" 0603 12.9,79.2 r90 top (schematic designator R9)
R10 "0R" 1206 8.3,172.375 r180 top
R11 "6.8R" 0603 51.2,98.2 r90 top
R12 "62R" 0603 25,106.86 r90 top
R13 "62R" 0603 25,109.9 r90 top
R14 "62R" 0603 25,114.48 r90 top
R15 "62R" 0603 25,117.52 r90 top
R16 "51k" 0603 46.2,79.7 r90 top
R17 "33k" 0603 47.4,79.7 r90 top
R18 "2.7k" 0603 14.6,97.6 r90 top
R19 "1.2k" 0603 15.8,99.1 r270 top
R20 "100R" 0603 40.1,114.6 r90 top
R21 "1M" 0603 17.4,97.6 r90 top
R22 "1M" 0603 52.6,80.6 r270 top
R23 "3.9k" 0603 25.6,99.9 r180 top
R24 "0R" 0603 51.45,79.1 r90 top
R25 "PT1000" 1206 27,99.9 r0 top
R26 "100R" 0603 6.4,91.3 r90 top
R27 "10R" 0603 31.1,85.2 r180 top
R28 "10k" 0603 72.1,116.18 r270 top
R29 "10k" 0603 73.3,116.18 r270 top
T1_BB1 "750312504" 750312504 40.14,2.775 r90 top (schematic designator T1)
T1_BB2 "750312504" 750312504 40.14,26.775 r90 top (schematic designator T1)
T1_BB3 "750312504" 750312504 40.14,50.775 r90 top (schematic designator T1)
T1_BB4 "750312504" 750312504 40.14,126.775 r90 top (schematic designator T1)
T1_BB5 "750312504" 750312504 40.14,150.775 r90 top (schematic designator T1)
T1_BB6 "750312504" 750312504 40.14,178.775 r90 top (schematic designator T1)
T2 "HM2100NL" HM2100NL 8.71,118.02 r0 top
U1 "LTC3300-1" eLQFP-48 45.4,91.7 r0 top
U2 "LTC6813-1" eLQFP-64 9.6,92.8 r0 top
U3 "74HC4067D" SO-24 69.7,106.02 r180 top

## Footprints (in the part's own frame and the unit in brackets; to place one, negate y for a bottom-side part, rotate by r counter-clockwise, add the part's x,y. Pads: shape width x height; smd on the part's side, far side on the other; paste and mask are expansions set on the pad)
0603 [mm]
  rect 0.6x0.9 smd: 1(0,0) 2(1.5,0)
  silkscreen extent -0.05,-0.4 1.55,0.4, body extent -0.05,-0.4 1.55,0.4, height 0.43
1206 [mm]
  rect 0.9x1.6 smd: 1(0,0) 2(2.9,0)
  silkscreen extent -0.15,-0.8 3.05,0.8, body extent -0.15,-0.8 3.05,0.8, height 0.59
750312504 [mm]
  rect 2.5x1.5 smd: 1(0,0) 2(0,2.48) 4(0,7.44) 5(0,9.92) 6(16.36,9.92) 7(16.36,7.44) 9(16.36,2.48) 10(16.36,0)
  silkscreen extent 1.45,-1.77 14.91,11.69, body extent 1.45,-1.77 14.91,11.69, height 12.7
"CAP 0603" [mm]
  rect 0.6x0.9 smd: 1(0,0) 2(1.5,0)
  silkscreen extent -0.05,-0.4 1.55,0.4, body extent -0.05,-0.41 1.55,0.41, height 0.81
"CAP 1210" [mm]
  rect 1.15x2.7 smd: 1(0,0) 2(3,0)
  silkscreen extent -0.1,-1.25 3.1,1.25, body extent -0.1,-1.25 3.1,1.25, height 2.49
eLQFP-48 [mm]
  rect 1.3x0.3 smd: 1(0,0) 2(0,-0.5) 3(0,-1) 4(0,-1.5) 5(0,-2) 6(0,-2.5) 7(0,-3) 8(0,-3.5) 9(0,-4) 10(0,-4.5) 11(0,-5) 12(0,-5.5) 25(8.5,-5.5) 26(8.5,-5) 27(8.5,-4.5) 28(8.5,-4) 29(8.5,-3.5) 30(8.5,-3) 31(8.5,-2.5) 32(8.5,-2) 33(8.5,-1.5) 34(8.5,-1) 35(8.5,-0.5) 36(8.5,0)
  rect 0.3x1.3 smd: 13(1.5,-7) 14(2,-7) 15(2.5,-7) 16(3,-7) 17(3.5,-7) 18(4,-7) 19(4.5,-7) 20(5,-7) 21(5.5,-7) 22(6,-7) 23(6.5,-7) 24(7,-7) 37(7,1.5) 38(6.5,1.5) 39(6,1.5) 40(5.5,1.5) 41(5,1.5) 42(4.5,1.5) 43(4,1.5) 44(3.5,1.5) 45(3,1.5) 46(2.5,1.5) 47(2,1.5) 48(1.5,1.5)
  rect 3.6x3.6 smd: 49(4.25,-2.75)
  silkscreen extent 1.26,-5.74 7.24,0.24, body extent -0.25,-7.25 8.75,1.75, height 1.59
eLQFP-64 [mm]
  rect 1.3x0.3 smd: 1(0,0) 2(0,-0.5) 3(0,-1) 4(0,-1.5) 5(0,-2) 6(0,-2.5) 7(0,-3) 8(0,-3.5) 9(0,-4) 10(0,-4.5) 11(0,-5) 12(0,-5.5) 13(0,-6) 14(0,-6.5) 15(0,-7) 16(0,-7.5) 33(11.5,-7.5) 34(11.5,-7) 35(11.5,-6.5) 36(11.5,-6) 37(11.5,-5.5) 38(11.5,-5) 39(11.5,-4.5) 40(11.5,-4) 41(11.5,-3.5) 42(11.5,-3) 43(11.5,-2.5) 44(11.5,-2) 45(11.5,-1.5) 46(11.5,-1) 47(11.5,-0.5) 48(11.5,0)
  rect 0.3x1.3 smd: 17(2,-9.5) 18(2.5,-9.5) 19(3,-9.5) 20(3.5,-9.5) 21(4,-9.5) 22(4.5,-9.5) 23(5,-9.5) 24(5.5,-9.5) 25(6,-9.5) 26(6.5,-9.5) 27(7,-9.5) 28(7.5,-9.5) 29(8,-9.5) 30(8.5,-9.5) 31(9,-9.5) 32(9.5,-9.5) 49(9.5,2) 50(9,2) 51(8.5,2) 52(8,2) 53(7.5,2) 54(7,2) 55(6.5,2) 56(6,2) 57(5.5,2) 58(5,2) 59(4.5,2) 60(4,2) 61(3.5,2) 62(3,2) 63(2.5,2) 64(2,2)
  rect 5.75x5.75 smd: 65(5.75,-3.75)
  silkscreen extent 1.26,-8.24 10.24,0.74, body extent -0.25,-9.75 11.75,2.25, height 1.58
HM2100NL [mm]
  rect 1.89x1.27 smd: 1(0,0) 2(0,-2.54) 3(0,-5.08) 4(0,-7.62) 5(0,-10.16) 6(13.79,-10.16) 7(13.79,-7.62) 8(13.79,-5.08) 9(13.79,-2.54) 10(13.79,0)
  silkscreen extent 1.94,-12.43 11.85,2.27, body extent -0.59,-12.43 14.38,2.27, height 3.22
"KO-CAP T591D" [mm]
  rect 2.37x2.43 smd: 1(0,0) 2(6.24,0)
  silkscreen extent -0.53,-2.15 6.77,2.15, body extent -0.68,-2.3 6.92,2.3, height 3.06
"MSTBA 2.5 4 G THT 5.08" [mm]
  round 2.5 hole 1.4: 1(0,0) 2(5.08,0) 3(10.16,0) 4(15.24,0)
  silkscreen extent -3.54,-10 18.78,2, body extent -3.54,-10 18.78,2, height 8.6
PowerDI-123 [mm]
  rect 1.05x1.5 smd: 1(0,0)
  rect 2.4x1.5 smd: 2(2.375,0)
  silkscreen extent -0.33,-0.89 3.38,0.89, body extent -0.42,-0.97 3.48,0.96, height 0.99
"PowerPAK SO-8 Single" [mm]
  rect 1.27x0.61 smd: 1(0,0) 2(0,-1.27) 3(0,-2.54) 4(0,-3.81)
  rect 3.81x3.91 smd: 5(3.36,-1.905)
  rect 1.02x0.61 smd: 5(5.465,-3.81) 6(5.465,-2.54) 7(5.465,-1.27) 8(5.465,0)
  silkscreen extent -0.41,-4.48 5.74,1.07, body extent -0.4,-4.48 5.75,0.67, height 1.02
"PTSM 0.5 2 HH THT" [mm]
  round 2 hole 1.1: 1(0,0) 2(2.5,0)
  silkscreen extent -2.1,-7.2 4.6,0.6, body extent -2.1,-7.2 4.6,0.6, height 5
"PTSM 0.5 4 HH THT" [mm]
  round 2 hole 1.1: 1(0,0) 2(2.5,0) 3(5,0) 4(7.5,0)
  silkscreen extent -2.1,-7.2 9.6,0.6, body extent -2.1,-7.2 9.6,0.6, height 5
SO-24 [mm]
  rect 2.4x0.7 smd: 1(0,0) 2(0,-1.27) 3(0,-2.54) 4(0,-3.81) 5(0,-5.08) 6(0,-6.35) 7(0,-7.62) 8(0,-8.89) 9(0,-10.16) 10(0,-11.43) 11(0,-12.7) 12(0,-13.97) 13(8.8,-13.97) 14(8.8,-12.7) 15(8.8,-11.43) 16(8.8,-10.16) 17(8.8,-8.89) 18(8.8,-7.62) 19(8.8,-6.35) 20(8.8,-5.08) 21(8.8,-3.81) 22(8.8,-2.54) 23(8.8,-1.27) 24(8.8,0)
  silkscreen extent 1.89,-14.6 6.92,0.64, body extent -0.75,-14.73 9.55,0.77, height 2.65
SOT-223 [mm]
  rect 1.2x1.6 smd: 1(0,0) 2(2.3,0) 3(4.6,0)
  rect 3.3x1.6 smd: 2(2.3,6.4)
  silkscreen extent -0.95,-0.3 5.55,6.7, body extent -0.95,-0.3 5.55,6.7, height 1.59
"WSL1206 2m to 5m9" [mm]
  rect 1.57x1.78 smd: 1(0,0) 2(2.33,0)
  silkscreen extent -0.44,-0.8 2.77,0.8, body extent -0.44,-0.8 2.76,0.8, height 0.62

## Part data
C1_BB1 C1_BB2 C1_BB3 C1_BB4 C1_BB5 C1_BB6 C2_BB1 C2_BB2 C2_BB3 C2_BB4 C2_BB5 C2_BB6: library part 7, Dielectric=C0G, Package=0603, Tolerance=5%, Voltage=50V, ID=7, Mounting=SMT
C3_BB1 C3_BB2 C3_BB3 C3_BB4 C3_BB5 C3_BB6 C4_BB1 C4_BB2 C4_BB3 C4_BB4 C4_BB5 C4_BB6: library part 1, Package="EIA 7343-31", Supplier Part Number 1=399-12271-1-ND, Tolerance=20%, Voltage=16V, ComponentLink1Description=Datasheet, ComponentLink1URL=https://api.kemet.com/component-edge/download/datasheet/T591D107M016ATE050.pdf, Designation=T591D107M016ATE050, ID=1, Mounting=SMT, Supplier 1=Digi-Key, Technology=Polymer
C5_BB1 C5_BB2 C5_BB3 C5_BB4 C5_BB5 C5_BB6 C6_BB1 C6_BB2 C6_BB3 C6_BB4 C6_BB5 C6_BB6: library part 9, Dielectric=X7R, Package=1210, Supplier Part Number 1=399-13375-1-ND, Tolerance=10%, Voltage=100V, ID=9, Mounting=SMT, Supplier 1=Digi-Key
C7_BB1 C7_BB2 C7_BB3 C7_BB4 C7_BB5 C7_BB6 C8_BB1 C8_BB2 C8_BB3 C8_BB4 C8_BB5 C8_BB6: library part 6, Dielectric=X7R, Package=0603, Tolerance=10%, Voltage=50V, ID=6, Mounting=SMT
C9_FB1 C9_FB2 C9_FB3 C9_FB4 C9_FB5 C9_FB6 C10_FB1 C10_FB2 C10_FB3 C10_FB4 C10_FB5 C10_FB6 C11 C23 C26 C27 C29: library part 5, Package=0603, ID=5, Mounting=SMT
C12 C16: library part 4, Package=0603, ID=4, Mounting=SMT
C13 C14 C15 C17 C18 C19 C20 C21 C22 C24 C25 C28: library part 8, Dielectric=X7R, Package=0603, Supplier Part Number 1=1276-6524-1-ND, Tolerance=20%, Voltage=16V, ID=8, Mounting=SMT, Supplier 1=Digi-Key
D1_BB1 D1_BB2 D1_BB3 D1_BB4 D1_BB5 D1_BB6 D2_BB1 D2_BB2 D2_BB3 D2_BB4 D2_BB5 D2_BB6 D3_BB1 D3_BB2 D3_BB3 D3_BB4 D3_BB5 D3_BB6 D4_BB1 D4_BB2 D4_BB3 D4_BB4 D4_BB5 D4_BB6 D5: library part 2, Supplier Part Number 1=DFLS1100DICT-ND, ComponentLink1Description=Datasheet, ComponentLink1URL=https://www.diodes.com/assets/Datasheets/ds30497.pdf, Designation=DFLS1100-7, ID=2, Supplier 1=Digi-Key
J1 J2: library part 3, "2 Pin Connector", Supplier Part Number 1=148-41-887, Desc="2 Pin Connector", Designation=1778625, ID=3, Supplier 1=Distrelec
J3 J4: library part 5, "4 Pin Connector", Supplier Part Number 1=301-07-680, Descr="4 Pin Connector", Designation=1757268, ID=5, Supplier 1=Distrelec
J5: library part 4, "4 Pin Connector", Supplier Part Number 1=148-41-896, Descr="4 Pin Connector", Designation=1778780, ID=4, Supplier 1=Distrelec
Q1_BB1 Q1_BB2 Q1_BB3 Q1_BB4 Q1_BB5 Q1_BB6 Q2_BB1 Q2_BB2 Q2_BB3 Q2_BB4 Q2_BB5 Q2_BB6: library part 2, Supplier Part Number 1=SIR882DP-T1-GE3CT-ND, ComponentLink1Description=Datasheet, ComponentLink1URL=https://www.vishay.com/docs/65932/sir882dp.pdf, Designation=SiR882DP, ID=2, Supplier 1=Digi-Key
Q3: library part 1, Supplier Part Number 1=DZT5551DICT-ND, ComponentLink1Description=Datasheet, ComponentLink1URL=https://www.diodes.com/assets/Datasheets/ds31219.pdf, Designation=DZT5551, ID=1, Supplier 1=Digi-Key
R1_BB1 R1_BB2 R1_BB3 R1_BB4 R1_BB5 R1_BB6 R2_BB1 R2_BB2 R2_BB3 R2_BB4 R2_BB5 R2_BB6: library part 255, Package=0603, Power Rating=0.1W, Tolerance=1%, ID=255, Mounting=SMD, Type=Chip
R3_BB1 R3_BB2 R3_BB3 R3_BB4 R3_BB5 R3_BB6 R4_BB1 R4_BB2 R4_BB3 R4_BB4 R4_BB5 R4_BB6: library part 212, Package=0603, Power Rating=0.1W, Tolerance=1%, ID=212, Mounting=SMD, Type=Chip
R5_BB1 R5_BB2 R5_BB3 R5_BB4 R5_BB5 R5_BB6: library part 268, Package=0603, Power Rating=0.1W, Tolerance=1%, ID=268, Mounting=SMD, Type=Chip
R6_BB1 R6_BB2 R6_BB3 R6_BB4 R6_BB5 R6_BB6: library part 256, Package=0603, Power Rating=0.1W, Tolerance=1%, ID=256, Mounting=SMD, Type=Chip
R7_BB1 R7_BB2 R7_BB3 R7_BB4 R7_BB5 R7_BB6 R8_BB1 R8_BB2 R8_BB3 R8_BB4 R8_BB5 R8_BB6: library part 2, Package=1206, ID=2, Mounting=SMT
R9_FB1 R9_FB2 R9_FB3 R9_FB4 R9_FB5 R9_FB6 R27: library part 219, Package=0603, Power Rating=0.1W, Tolerance=1%, ID=219, Mounting=SMD, Type=Chip
R10: library part 580, Package=1206, Power Rating=0.25W, Tolerance=1%, ID=580, Mounting=SMD, Type=Chip
R11: library part 215, Package=0603, Power Rating=0.1W, Tolerance=1%, ID=215, Mounting=SMD, Type=Chip
R12 R13 R14 R15: library part 238, Package=0603, Power Rating=0.1W, Tolerance=1%, ID=238, Mounting=SMD, Type=Chip
R16: library part 308, Package=0603, Power Rating=0.1W, Tolerance=1%, ID=308, Mounting=SMD, Type=Chip
R17: library part 303, Package=0603, Power Rating=0.1W, Tolerance=1%, ID=303, Mounting=SMD, Type=Chip
R18: library part 277, Package=0603, Power Rating=0.1W, Tolerance=1%, ID=277, Mounting=SMD, Type=Chip
R19: library part 269, Package=0603, Power Rating=0.1W, Tolerance=1%, ID=269, Mounting=SMD, Type=Chip
R20 R26: library part 243, Package=0603, Power Rating=0.1W, Tolerance=1%, ID=243, Mounting=SMD, Type=Chip
R21 R22: library part 339, Package=0603, Power Rating=0.1W, Tolerance=1%, ID=339, Mounting=SMD, Type=Chip
R23: library part 281, Package=0603, Power Rating=0.1W, Tolerance=1%, ID=281, Mounting=SMD, Type=Chip
R24: library part 194, Package=0603, Power Rating=0.1W, Tolerance=1%, ID=194, Mounting=SMD, Type=Chip
R25: library part 1, Package=1206, Supplier Part Number 1=PTS12061.0KCT-ND, ComponentLink1Description=Datasheet, ComponentLink1URL=https://www.vishay.com/docs/28762/ptsserie.pdf, Designation=PTS120601B1K00P100, Device Height=0.55mm, ID=1, Mounting=SMT, Supplier 1=Digi-Key
R28 R29: library part 291, Package=0603, Power Rating=0.1W, Tolerance=1%, ID=291, Mounting=SMD, Type=Chip
T1_BB1 T1_BB2 T1_BB3 T1_BB4 T1_BB5 T1_BB6: library part 2, "Flyback Transformer", Primary Inductance=3.46uH, Saturation Current=10.2A, Supplier Part Number 1=1297-1018-1-ND, Tolerance=10%, ComponentLink1Description=Datasheet, ComponentLink1URL=http://katalog.we-online.de/pbs/datasheet/750312504.pdf, DCR Primary=10m, DCR Secondary=10m, Designation=750312504, Device Height=12.7mm, ID=2, Insulation=0.5kV, Mounting=SMT, Supplier 1=Digi-Key, Turns Ratio=1:1
T2: library part 3, "BMS Communication Transformer with Choke", Primary Inductance=300uH, Supplier Part Number 1=1840-1032-1-ND, Tolerance=50%, ComponentLink1Description=Datasheet, ComponentLink1URL=https://productfinder.pulseeng.com/doc_type/WEB301/doc_num/HM2100NL/doc_part/HM2100NL.pdf, DCR Primary=850m, DCR Secondary=450m, Designation=HM2100NL, Device Height=3.45mm, ID=3, Insulation=4.3kV, Mounting=SMT, Supplier 1=Digi-Key, Turns Ratio=1:1
U1: library part 2, "Battery Balancer", Package=eLQFP-48, Supplier Part Number 1=LTC3300ILXE-1#PBF-ND, ComponentLink1Description=Datasheet, ComponentLink1URL=https://www.analog.com/media/en/technical-documentation/data-sheets/33001fb.pdf, Designation=LTC3300-1, ID=2, Mounting=SMT, Supplier 1=Digi-Key
U2: library part 1, "Battery Monitor", Package=eLQFP-64, Supplier Part Number 1=LTC6813ILWE-1#3ZZPBF-ND, ComponentLink1Description=Datasheet, ComponentLink1URL=https://www.analog.com/media/en/technical-documentation/data-sheets/68131f.pdf, Designation=LTC6813-1, ID=1, Mounting=SMT, Supplier 1=Digi-Key
U3: library part 1, "MUX 16:1", Package=SO-24, Supplier Part Number 1=1727-6334-1-ND, ComponentLink1Description=Datasheet, ComponentLink1URL=https://www.analog.com/media/en/technical-documentation/data-sheets/6820fb.pdf, Designation=74HC4067D, ID=1, Mounting=SMT, Supplier 1=Digi-Key

## Free pads (board coordinates)
  round 6 hole 2.75: 1(-5.1,197.3)
  round 0.6 hole 0.5: 2(-2.913,197.3) 3(-3.554,198.846) 4(-5.1,199.487) 5(-6.646,198.846) 6(-7.287,197.3) 7(-6.646,195.754) 8(-5.1,195.113) 9(-3.554,195.754)

## Via types
v1: diameter 0.6, hole 0.3, Top Layer to Bottom Layer, 371 vias
v2: diameter 2, hole 1, Top Layer to Bottom Layer, 12 vias
v3: diameter 1.27, hole 0.711, Top Layer to Bottom Layer, 1 vias

## Nets (pads, with @x,y where several pads share a name; then routed paths per layer and width w, separated by ;. In a path a pad name is that pad's centre, name@x,y a point inside that pad or via, vN(x,y) a via of type N, cw(c..) or ccw(c..) an arc to the next point about the centre after c; other vN are vias at no path point)
B1: C1_BB1.2 C3_BB1.1 C3_BB2.2 C4_BB1.1 C4_BB2.2 C7_BB2.1 C19.1 C20.2 D1_BB1.2 D1_BB2.1 D4_BB2.1 J4.2 R7_BB2.1 R9_FB1.1 T1_BB1.1 T1_BB1.2 U1.24 | length 278.8
  Top Layer w0.2: R9_FB1.1@28.1,83.9 29.5,83.9 30.6,82.8 v1(30.6,79.4) ; U1.24@52.4,84.7 52.9,84.7 55.1,82.5 57.7,82.5 58,82.8 v1(58,83) C7_BB2.1@58,83.5 C19.1@59.2,83.5 60.3,83.5 60.6,83.2 C20.2@60.6,82.7 ; v1(58.925,36.625) 58.93,36.63 R7_BB2.1@58.93,38.49 ; v1(64.4,75.7) 78.2,75.7 79.2,74.7 79.2,37.1 77.9,35.8 76.4,35.8 75.775,35.175 J4.2@75.775,33.46
  Top Layer w0.7: 43.45,2.775 C1_BB1.2@43.45,8.25 ; R7_BB2.1@59.175,38.49 60.075,39.39 D4_BB2.1@60.075,43.375 ; C3_BB2.2@65.435,38.475 65.435,41.21 66.65,42.425 D1_BB2.1@69.25,42.425
  Top Layer w2: T1_BB1.2@38.1,2.775 T1_BB1.1@40.14,2.775 43.45,2.775 69,2.775 71.675,5.45 C3_BB1.1@71.675,14.375 D1_BB1.2@71.675,18.125 ; R7_BB2.1@59.175,38.49 65.42,38.49 65.435,38.475 C3_BB2.2@65.435,38.375 C4_BB2.2@65.435,32.885 ; C4_BB2.2@65.375,32.825 65.375,30.25 66.325,29.3 v2(67.775,29.3) ; v2(67.775,24.05) 71.625,24.05 ; D1_BB1.2@71.65,18.45 71.65,24.025 71.625,24.05 ; J4.2@75.775,33.46 77.94,33.46 79.325,32.075 79.325,25.3 78.075,24.05 71.625,24.05
  Signal Layer 2 w0.2: v1(58,83) 56.6,83 56,82.4 56,59.025 58.925,56.1 v1(58.925,36.625)
  Bottom Layer w0.2: v1(30.6,79.4) 30.6,78.5 32.1,77 60.195,77 61.495,75.7 v1(64.4,75.7)
  Bottom Layer w2: v2(67.775,24.05) v2(67.775,29.3)
B2: C1_BB2.2 C3_BB2.1 C3_BB3.2 C4_BB2.1 C4_BB3.2 C7_BB3.1 C18.1 C19.2 D1_BB2.2 D1_BB3.1 D4_BB3.1 J4.3 R7_BB3.1 R9_FB2.1 T1_BB2.1 T1_BB2.2 U1.27 | length 232.5
  Top Layer w0.2: R9_FB2.1@25.1,81.3 v1(25.7,81.3) ; U1.27@53.9,87.2 55.4,87.2 56.8,85.8 v1(59.2,85.8) ; v1(58.925,60.625) 58.93,60.63 R7_BB3.1@58.93,62.49 ; C19.2@59.2,85 v1(59.2,85.8) ; C7_BB3.1@61.8,85.8 C18.1@60.6,85.8 v1(59.2,85.8) ; v1(64.4,74.7) 65.5,74.7 65.95,75.15 77.845,75.15 78.65,74.345 78.65,38.89 78.3,38.54 J4.3@75.775,38.54
  Top Layer w0.7: 43.45,26.775 C1_BB2.2@43.45,32.25 ; R7_BB3.1@59.175,62.49 60.075,63.39 D4_BB3.1@60.075,67.375 ; C3_BB3.2@65.435,62.475 65.435,65.21 66.65,66.425 D1_BB3.1@69.25,66.425
  Top Layer w2: T1_BB2.2@38.1,26.775 T1_BB2.1@40.14,26.775 43.45,26.775 69,26.775 71.675,29.45 C3_BB2.1@71.675,38.375 ; R7_BB3.1@59.175,62.49 65.42,62.49 65.435,62.475 C3_BB3.2@65.435,62.375 C4_BB3.2@65.435,56.885 ; C4_BB3.2@65.375,56.825 65.375,53.925 66.05,53.25 v2(67.775,53.25) ; v2(67.75,48.1) 70.45,48.1 71.65,46.9 D1_BB2.2@71.65,42.45 ; D1_BB2.2@71.675,42.125 C3_BB2.1@71.675,38.375 ; J4.3@75.775,38.54 71.84,38.54 C3_BB2.1@71.675,38.375
  Signal Layer 1 w2: v2(67.75,48.1) v2@67.775,48.125
  Signal Layer 2 w0.2: v1(58.925,60.625) 58.925,80.325 59.2,80.6 v1(59.2,85.8)
  Bottom Layer w0.2: v1(25.7,81.3) 26.6,81.3 31.3,76.6 60.1,76.6 62,74.7 ; 61.995,74.7 62,74.7 ; v1(64.4,74.7) 62,74.7
  Bottom Layer w2: v2@67.775,48.125 v2(67.775,53.25)
B3: C1_BB3.2 C3_BB3.1 C3_BB4.2 C4_BB3.1 C4_BB4.2 C7_BB4.1 C17.1 C18.2 D1_BB3.2 D1_BB4.1 D4_BB4.1 J4.4 R7_BB4.1 R9_FB3.1 T1_BB3.1 T1_BB3.2 U1.30 | length 315.1
  Top Layer w0.2: R9_FB3.1@20.7,71.7 v1(20.7,72.3) ; U1.30@53.9,88.7 57.8,88.7 58,88.5 C7_BB4.1@58,88.1 C17.1@59.2,88.1 59.2,87.4 59.3,87.3 C18.2@60.6,87.3 v1(60.6,87.9) ; v1(58.925,136.625) 58.93,136.63 R7_BB4.1@58.93,138.49 ; v1(64.4,73.6) 65.4,73.6 66.3,74.5 77.545,74.5 78.1,73.945 78.1,44 77.72,43.62 J4.4@75.775,43.62
  Top Layer w0.7: 43.45,50.775 C1_BB3.2@43.45,56.25 ; R7_BB4.1@59.175,138.49 60.075,139.39 D4_BB4.1@60.075,143.375 ; C3_BB4.2@65.435,138.475 65.435,141.21 66.65,142.425 D1_BB4.1@69.25,142.425
  Top Layer w2: T1_BB3.2@38.1,50.775 T1_BB3.1@40.14,50.775 43.45,50.775 71.615,50.775 ; R7_BB4.1@59.175,138.49 65.42,138.49 65.435,138.475 C3_BB4.2@65.435,138.375 C4_BB4.2@65.435,132.885 ; C4_BB4.2@65.375,132.825 65.375,130.225 66.25,129.35 v2(67.775,129.35) ; v2(67.775,72.025) 70.125,72.025 71.65,70.5 D1_BB3.2@71.65,66.45 ; D1_BB3.2@71.675,66.125 C3_BB3.1@71.675,62.375 71.675,50.835 71.615,50.775 ; J4.4@75.775,43.62 75.775,48.55 73.55,50.775 71.615,50.775
  Signal Layer 2 w0.2: v1(58.925,136.625) 56.8,134.5 56.8,99.9 60.6,96.1 v1(60.6,87.9)
  Bottom Layer w0.2: v1(20.7,72.3) 28.2,72.3 32.1,76.2 60,76.2 62.6,73.6 v1(64.4,73.6)
  Bottom Layer w2: v2(67.775,72.025) v2(67.775,129.35)
B4: C1_BB4.2 C3_BB4.1 C3_BB5.2 C4_BB4.1 C4_BB5.2 C7_BB5.1 C15.1 C17.2 D1_BB4.2 D1_BB5.1 D4_BB5.1 J3.1 R7_BB5.1 R9_FB4.1 R20.2 T1_BB4.1 T1_BB4.2 U1.33 | length 337.7
  Top Layer w0.2: v1(18.1,73.6) R9_FB4.1@18.1,74.2 ; v1(27.4,77.6) 75.2,77.6 78.1,80.5 78.1,152.1 77.82,152.38 J3.1@75.775,152.38 ; U1.33@53.9,90.2 56.2,90.2 56.4,90.4 v1(59.2,90.4) ; v1(58.925,160.625) 58.93,160.63 R7_BB5.1@58.93,162.49 ; C17.2@59.2,89.6 v1(59.2,90.4) ; C7_BB5.1@61.8,90.4 C15.1@60.6,90.4 v1(59.2,90.4)
  Top Layer w0.7: R20.2@40.1,116.3 40.1,126.735 T1_BB4.1@40.14,126.775 ; 43.45,126.775 C1_BB4.2@43.45,132.25 ; R7_BB5.1@59.175,162.49 60.075,163.39 D4_BB5.1@60.075,167.375 ; C3_BB5.2@65.435,162.475 65.435,165.21 66.65,166.425 D1_BB5.1@69.25,166.425
  Top Layer w2: T1_BB4.2@38.1,126.775 T1_BB4.1@40.14,126.775 43.45,126.775 69,126.775 71.675,129.45 C3_BB4.1@71.675,138.375 D1_BB4.2@71.675,142.125 ; R7_BB5.1@59.175,162.49 65.42,162.49 65.435,162.475 C3_BB5.2@65.435,162.375 C4_BB5.2@65.435,156.885 ; C4_BB5.2@65.375,156.825 65.375,154.575 66.5,153.45 v2(67.775,153.45) ; v2(67.775,147.975) 71.6,147.975 ; D1_BB4.2@71.65,142.45 71.65,147.925 71.6,147.975 ; J3.1@75.775,152.38 75.775,149.35 74.4,147.975 71.6,147.975
  Signal Layer 2 w0.2: v1(58.925,160.625) 58.925,144.725 56,141.8 56,99.695 59.2,96.495 v1(59.2,90.4)
  Bottom Layer w0.2: v1(18.1,73.6) 25.6,73.6 26.7,74.7 26.7,77.3 27,77.6 v1(27.4,77.6)
  Bottom Layer w2: v2(67.775,147.975) v2(67.775,153.45)
B5: C1_BB5.2 C3_BB5.1 C3_BB6.2 C4_BB5.1 C4_BB6.2 C7_BB6.1 C14.1 C15.2 D1_BB5.2 D1_BB6.1 D4_BB6.1 J3.2 R7_BB6.1 R9_FB5.1 T1_BB5.1 T1_BB5.2 U1.36 | length 360.4
  Top Layer w0.2: v1(15.5,76.1) R9_FB5.1@15.5,76.7 ; v1(25.4,76.1) 28.3,76.1 29.4,77.2 75.4,77.2 78.65,80.45 78.65,156.85 78.04,157.46 J3.2@75.775,157.46 ; U1.36@53.9,91.7 53.9,91.94 54.06,92.1 56.825,92.1 57.025,91.9 v1(58,91.9) ; v1(58.8,188.625) 58.8,190.36 R7_BB6.1@58.93,190.49 ; C14.1@59.2,92.7 C7_BB6.1@58,92.7 v1(58,91.9) ; C15.2@60.6,91.9 v1(58,91.9)
  Top Layer w0.7: 43.45,150.775 C1_BB5.2@43.45,156.25 ; R7_BB6.1@59.175,190.49 60.075,191.39 D4_BB6.1@60.075,195.375 ; C3_BB6.2@65.435,190.475 65.435,193.21 66.65,194.425 D1_BB6.1@69.25,194.425
  Top Layer w2: T1_BB5.2@38.1,150.775 T1_BB5.1@40.14,150.775 43.45,150.775 69,150.775 71.675,153.45 C4_BB5.1@71.675,156.885 ; R7_BB6.1@59.175,190.49 65.42,190.49 65.435,190.475 C3_BB6.2@65.435,190.375 C4_BB6.2@65.435,184.885 ; C4_BB6.2@65.375,184.825 65.375,182.5 66.325,181.55 v2(67.775,181.55) ; v2(67.775,175.775) 70.3,175.775 71.65,174.425 D1_BB5.2@71.65,166.45 ; C4_BB5.1@71.615,156.825 C4_BB5.1@71.675,156.885 ; D1_BB5.2@71.675,166.125 C3_BB5.1@71.675,162.375 C4_BB5.1@71.675,156.885 ; J3.2@75.775,157.46 72.25,157.46 C4_BB5.1@71.675,156.885
  Signal Layer 2 w0.2: v1(58,91.9) 58,94.8 54.9,97.9 54.9,164.7 58.8,168.6 v1(58.8,188.625)
  Bottom Layer w0.2: v1(15.5,76.1) v1(25.4,76.1)
  Bottom Layer w2: v2(67.775,175.775) v2(67.775,181.55)
B6: C1_BB6.2 C3_BB6.1 C4_BB6.1 C14.2 D1_BB6.2 D5.1 J3.3 R9_FB6.1 R10.1 R26.1 T1_BB6.1 T1_BB6.2 U1.39 | length 368
  Top Layer w0.2: R26.1@6.4,91.3 6.4,79.7 8.4,77.7 v1(12.9,77.7) R9_FB6.1@12.9,79.2 ; v1(27.5,74) 30.2,76.7 75.6,76.7 79.2,80.3 79.2,100 ; U1.39@51.4,93.2 51.4,93.995 52.805,95.4 54,95.4 ; D5.1@54,97.325 54,95.4 ; C14.2@59.2,94.2 59.2,95 58.8,95.4 55.8,95.4 ; J3.3@75.775,162.54 75.775,160.325 76.1,160 78.5,160 79.2,159.3 79.2,100 ; v1(77.3,100) 56.6,100 55.8,99.2 55.8,95.4 ; v1(79.9,100) 79.2,100 ; 54,95.4 55.8,95.4
  Top Layer w0.7: 43.45,178.775 C1_BB6.2@43.45,184.25
  Top Layer w2: T1_BB6.2@38.1,178.775 T1_BB6.1@40.14,178.775 43.45,178.775 71.675,178.775 ; D1_BB6.2@71.675,194.125 C3_BB6.1@71.675,190.375 71.675,178.775 ; J3.3@75.775,162.54 77.665,162.54 79.05,163.925 79.05,176.325 76.6,178.775 71.675,178.775
  Signal Layer 2 w0.2: v1(77.3,100) v1(79.9,100)
  Bottom Layer w0.2: v1(12.9,77.7) 12.9,73.8 13.7,73 26.5,73 v1(27.5,74)
  Bottom Layer w5: v3@11.025,172.5 v3(11.175,172.5) 58.525,172.5 68.485,162.54 J3.3@75.775,162.54
CSBM: U1.16 U2.41 | length 39.2
  Top Layer w0.2: U2.41@21.1,89.3 v1(23.3,89.3) ; v1(48.1,82.6) 48.4,82.9 U1.16@48.4,84.7
  Bottom Layer w0.2: v1(23.3,89.3) 23.3,89.9 24.1,90.7 26.5,90.7 26.9,90.3 26.9,83 29.05,80.85 46.35,80.85 v1(48.1,82.6)
G1P: D4_BB1.2 R3_BB1.1 U1.23 | length 71.2
  Top Layer w0.2: U1.23@51.9,84.7 51.9,83.9 52.4,83.4 v1(52.4,82.6) ; R3_BB1.1@57.7,17.03 D4_BB1.2@57.7,19.375 v1(57.7,20.4)
  Signal Layer 2 w0.2: v1(52.4,82.6) 54.3,82.6 54.9,82 54.9,58.64 56,57.54 56,35.8 57.7,34.1 v1(57.7,20.4)
G1S: R4_BB1.2 U1.11 | length 116.4
  Top Layer w0.2: v1(9.07,4.67) R4_BB1.2@9.7,4.67 ; v1(43.9,86.5) 44.5,86.5 44.7,86.7 U1.11@45.4,86.7
  Signal Layer 2 w0.2: v1(9.07,4.67) 14.07,4.67 15.7,6.3 15.7,68.9 16.525,69.725 42.125,69.725 43.9,71.5 v1(43.9,86.5)